# Altium PCB PA-03225-V0.4-4.PcbDoc (part 1 of 4)
Units mm, origin at the board's own origin, x right, y up, seen from the top; angles counter-clockwise.
Board outline 43 x 41 mm, 6 copper layers (Top Layer, GND, L3, L4, PWR, Bottom Layer); 103 components, 178 nets, 551 pads, 290 vias.
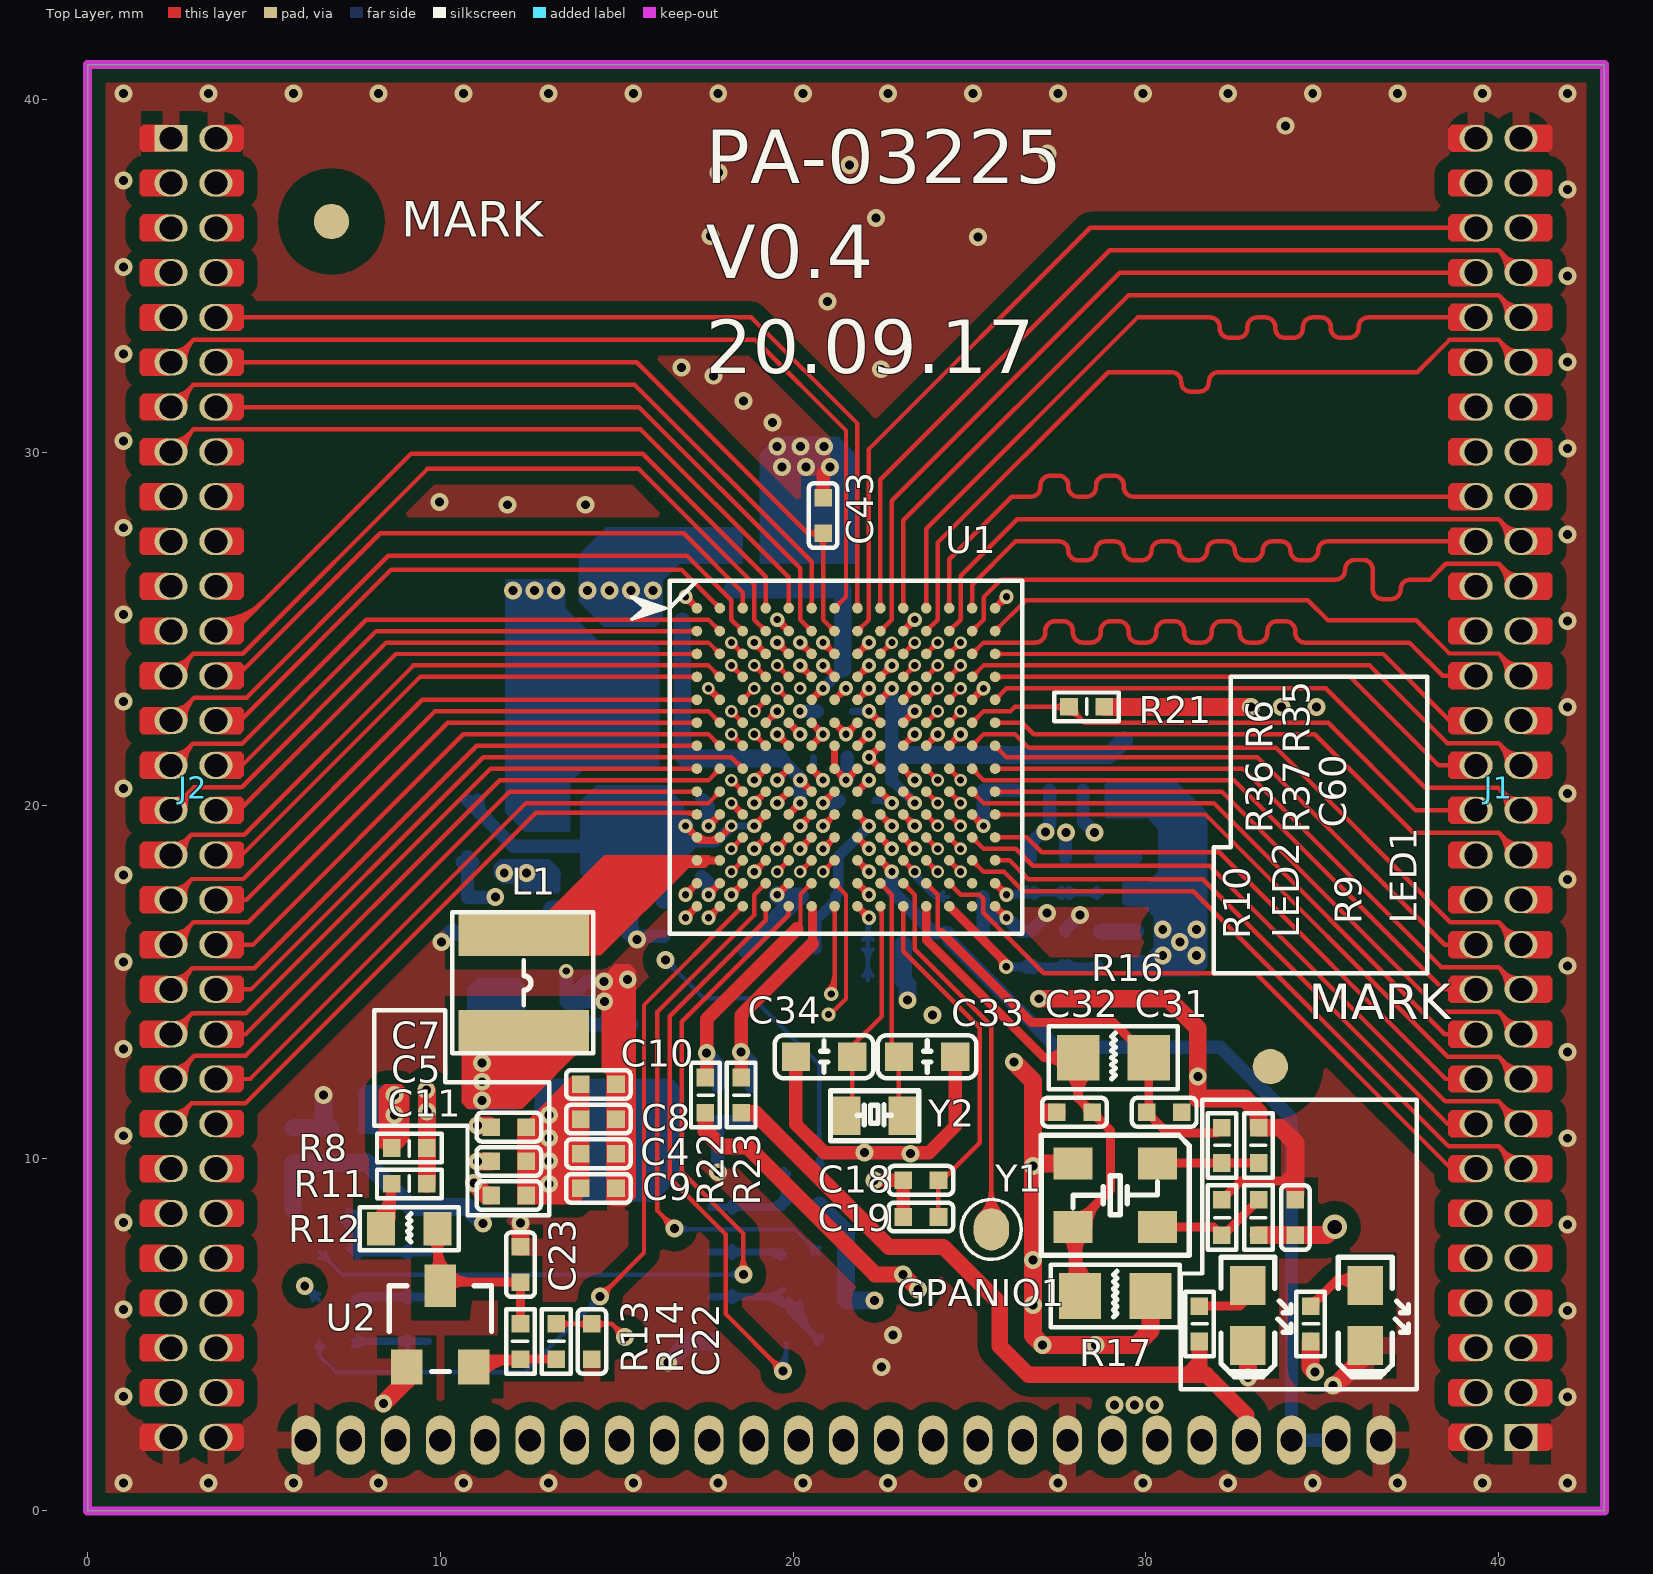
[diagram p0: Top Layer view]
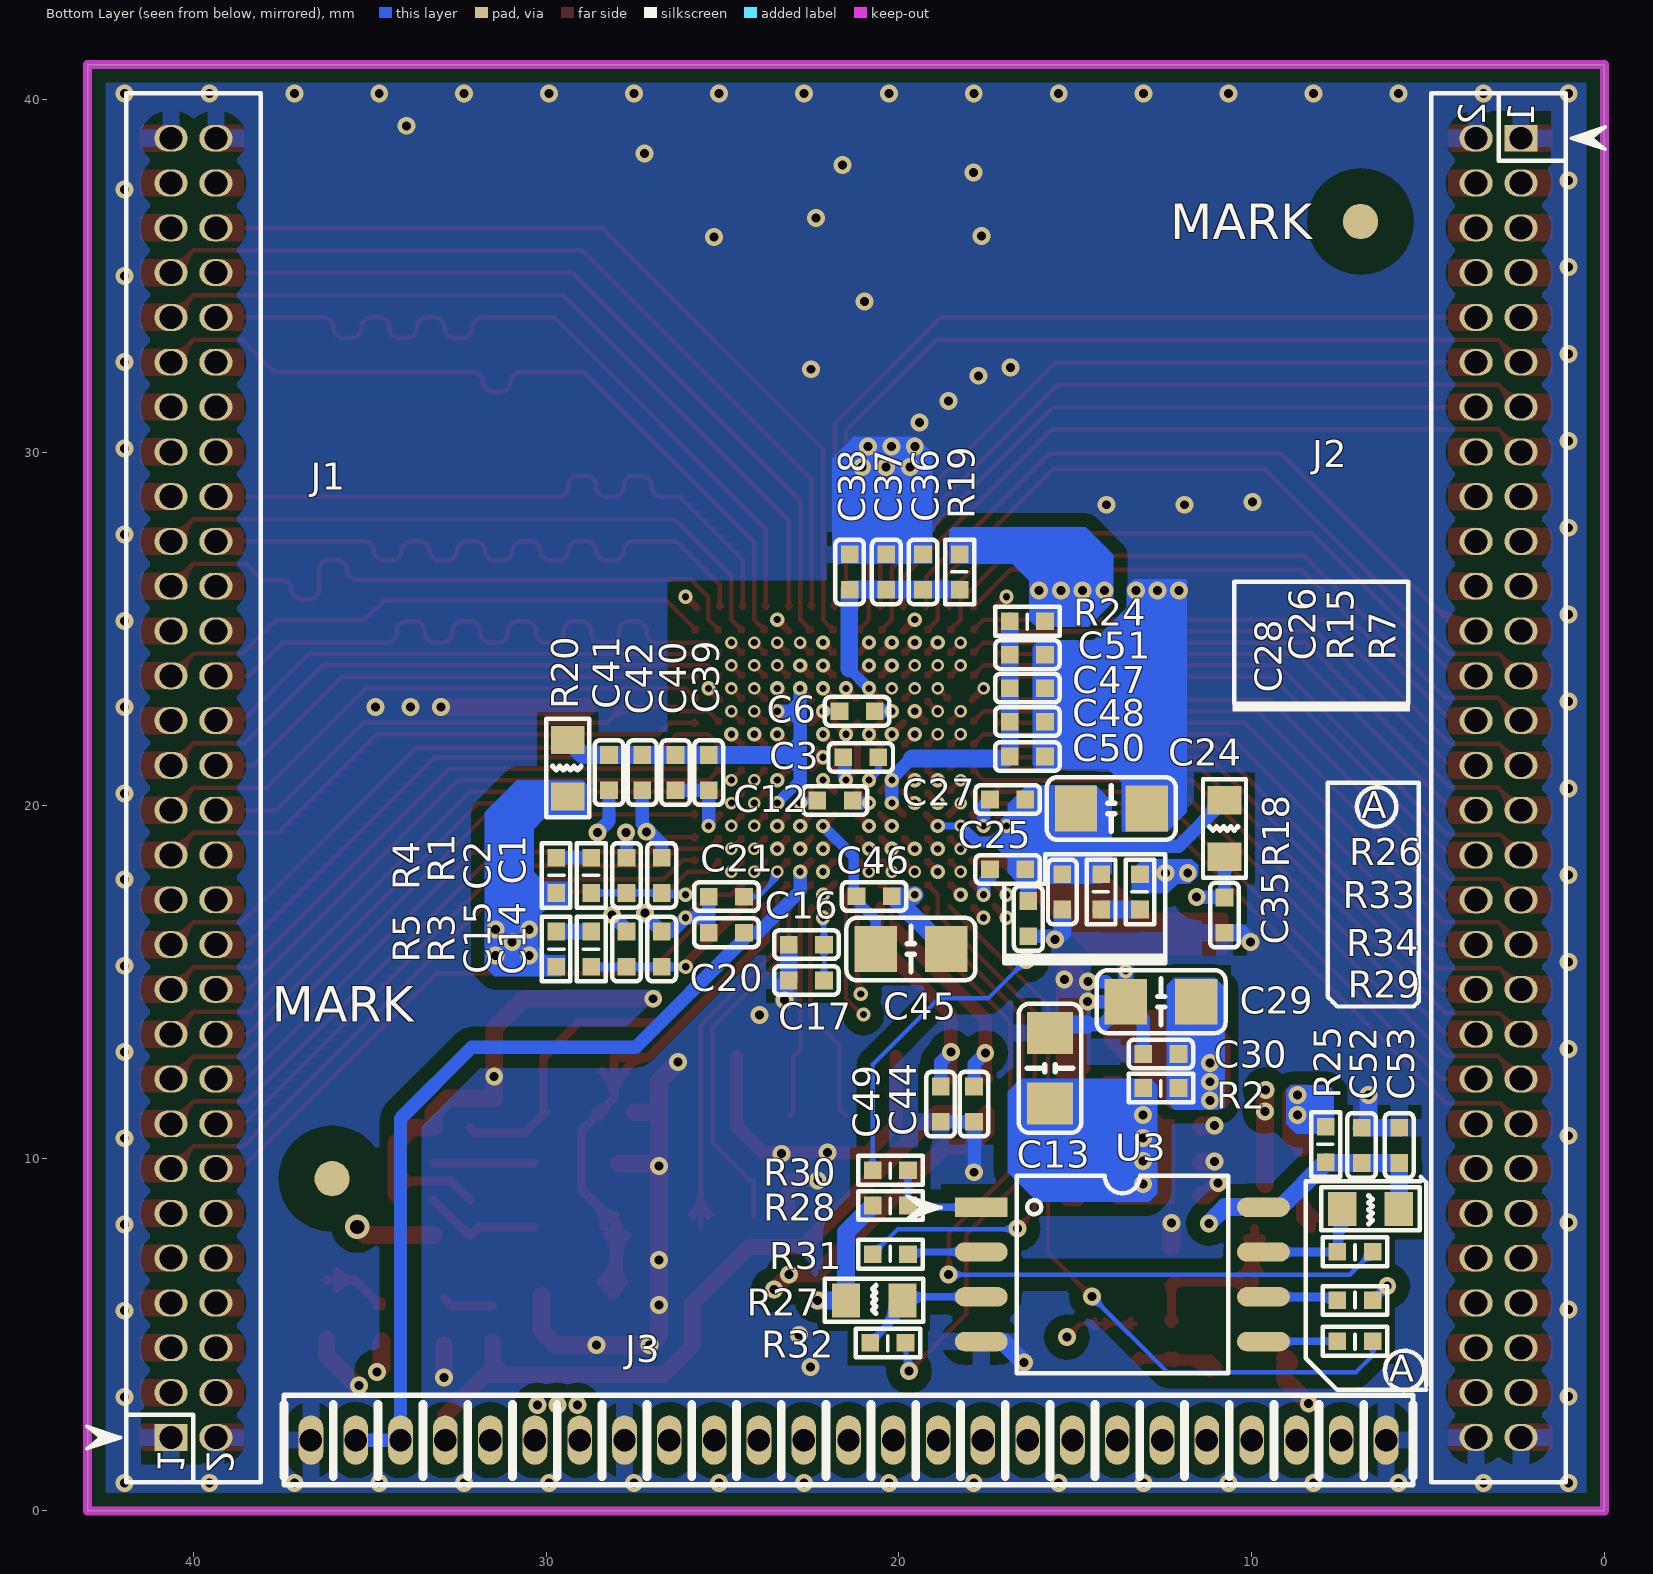
[diagram p1: Bottom Layer view, seen from below]
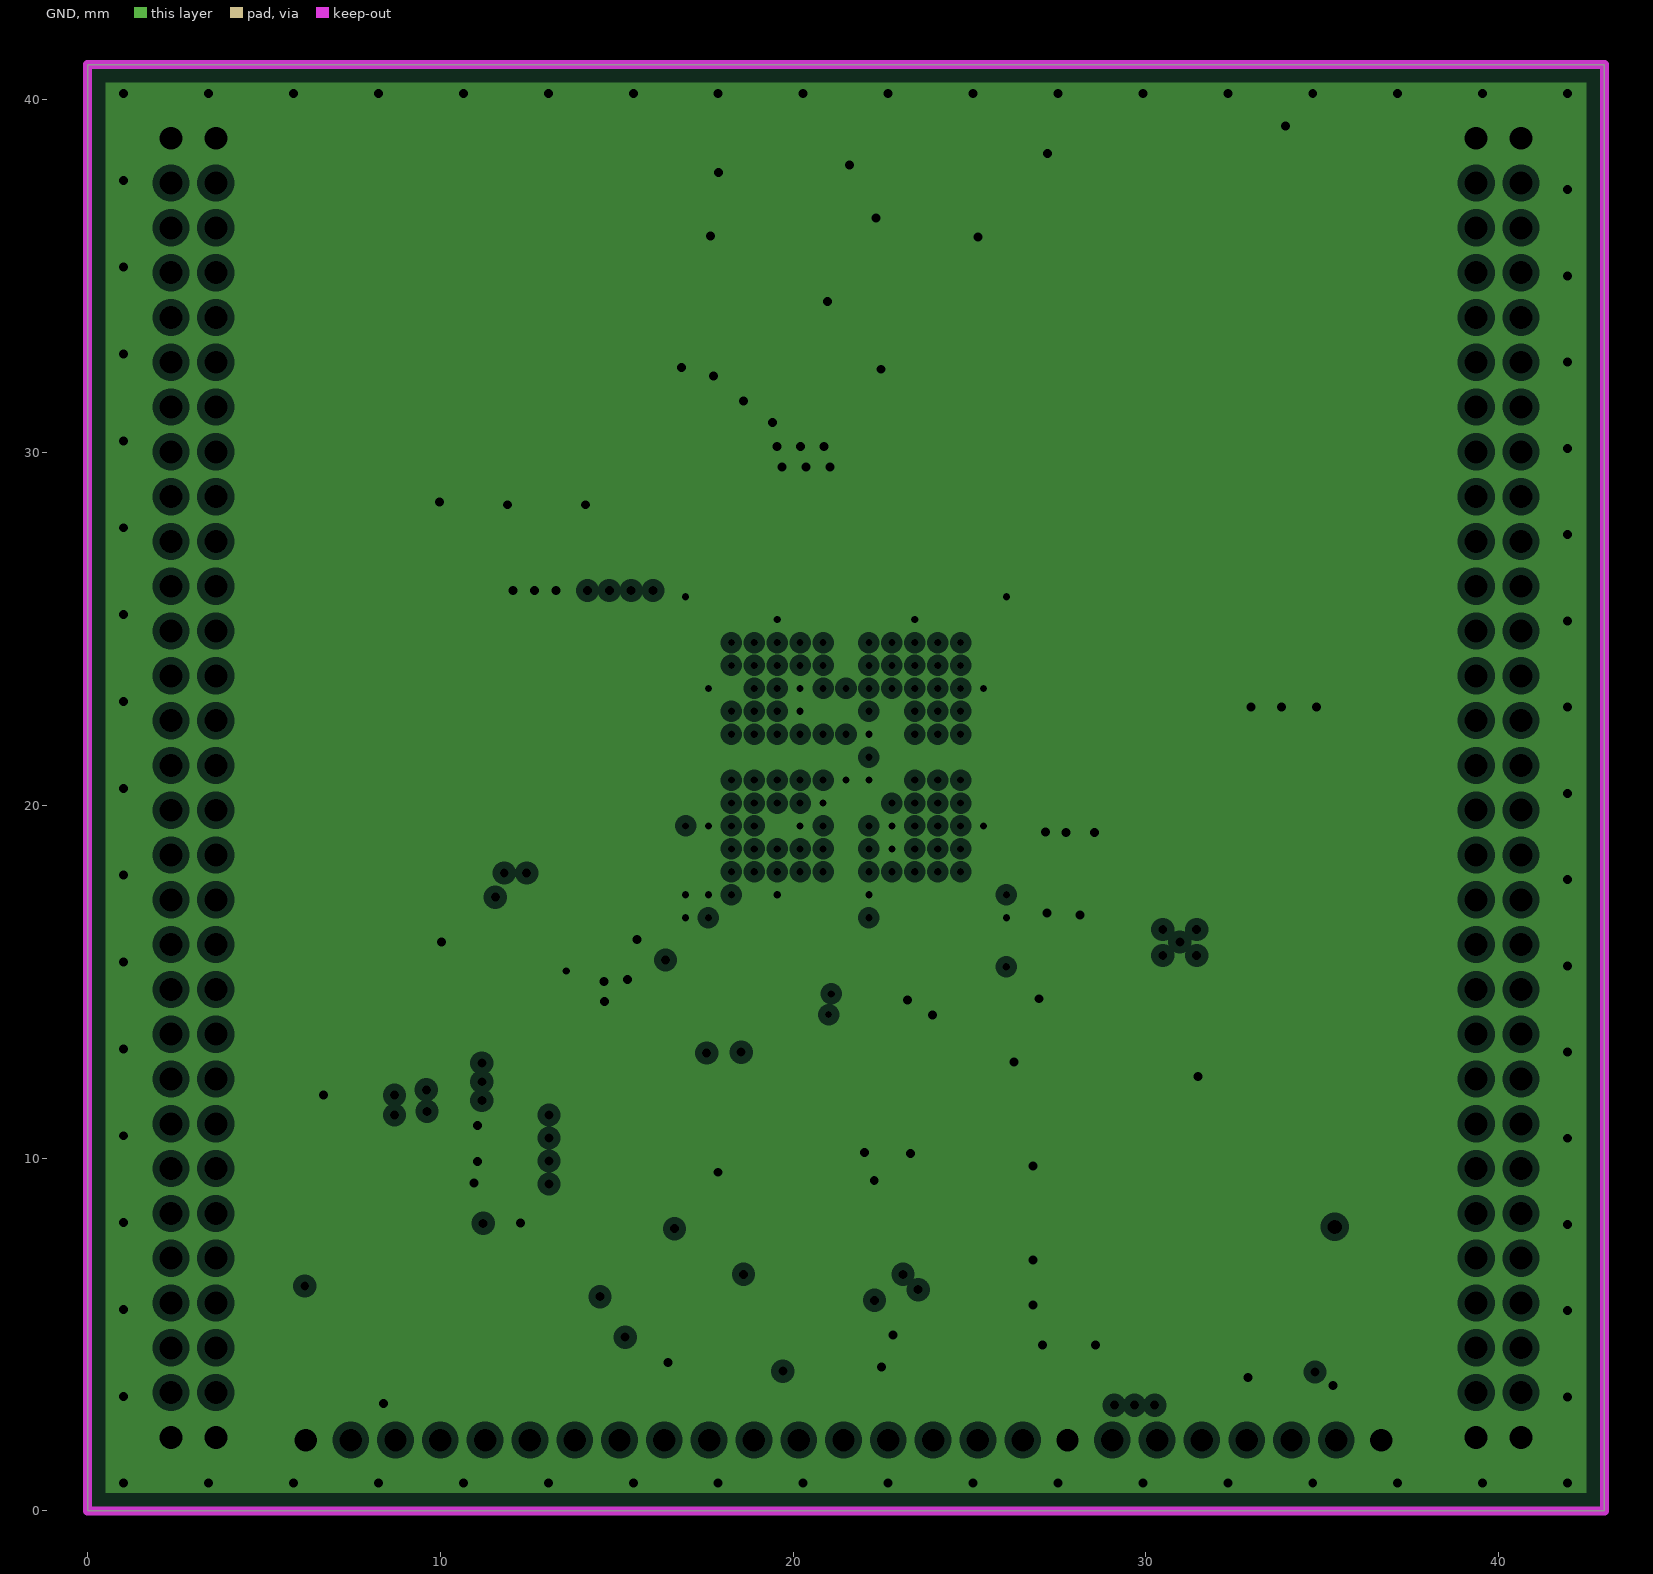
[diagram p2: GND, clearances drawn from the general rule]
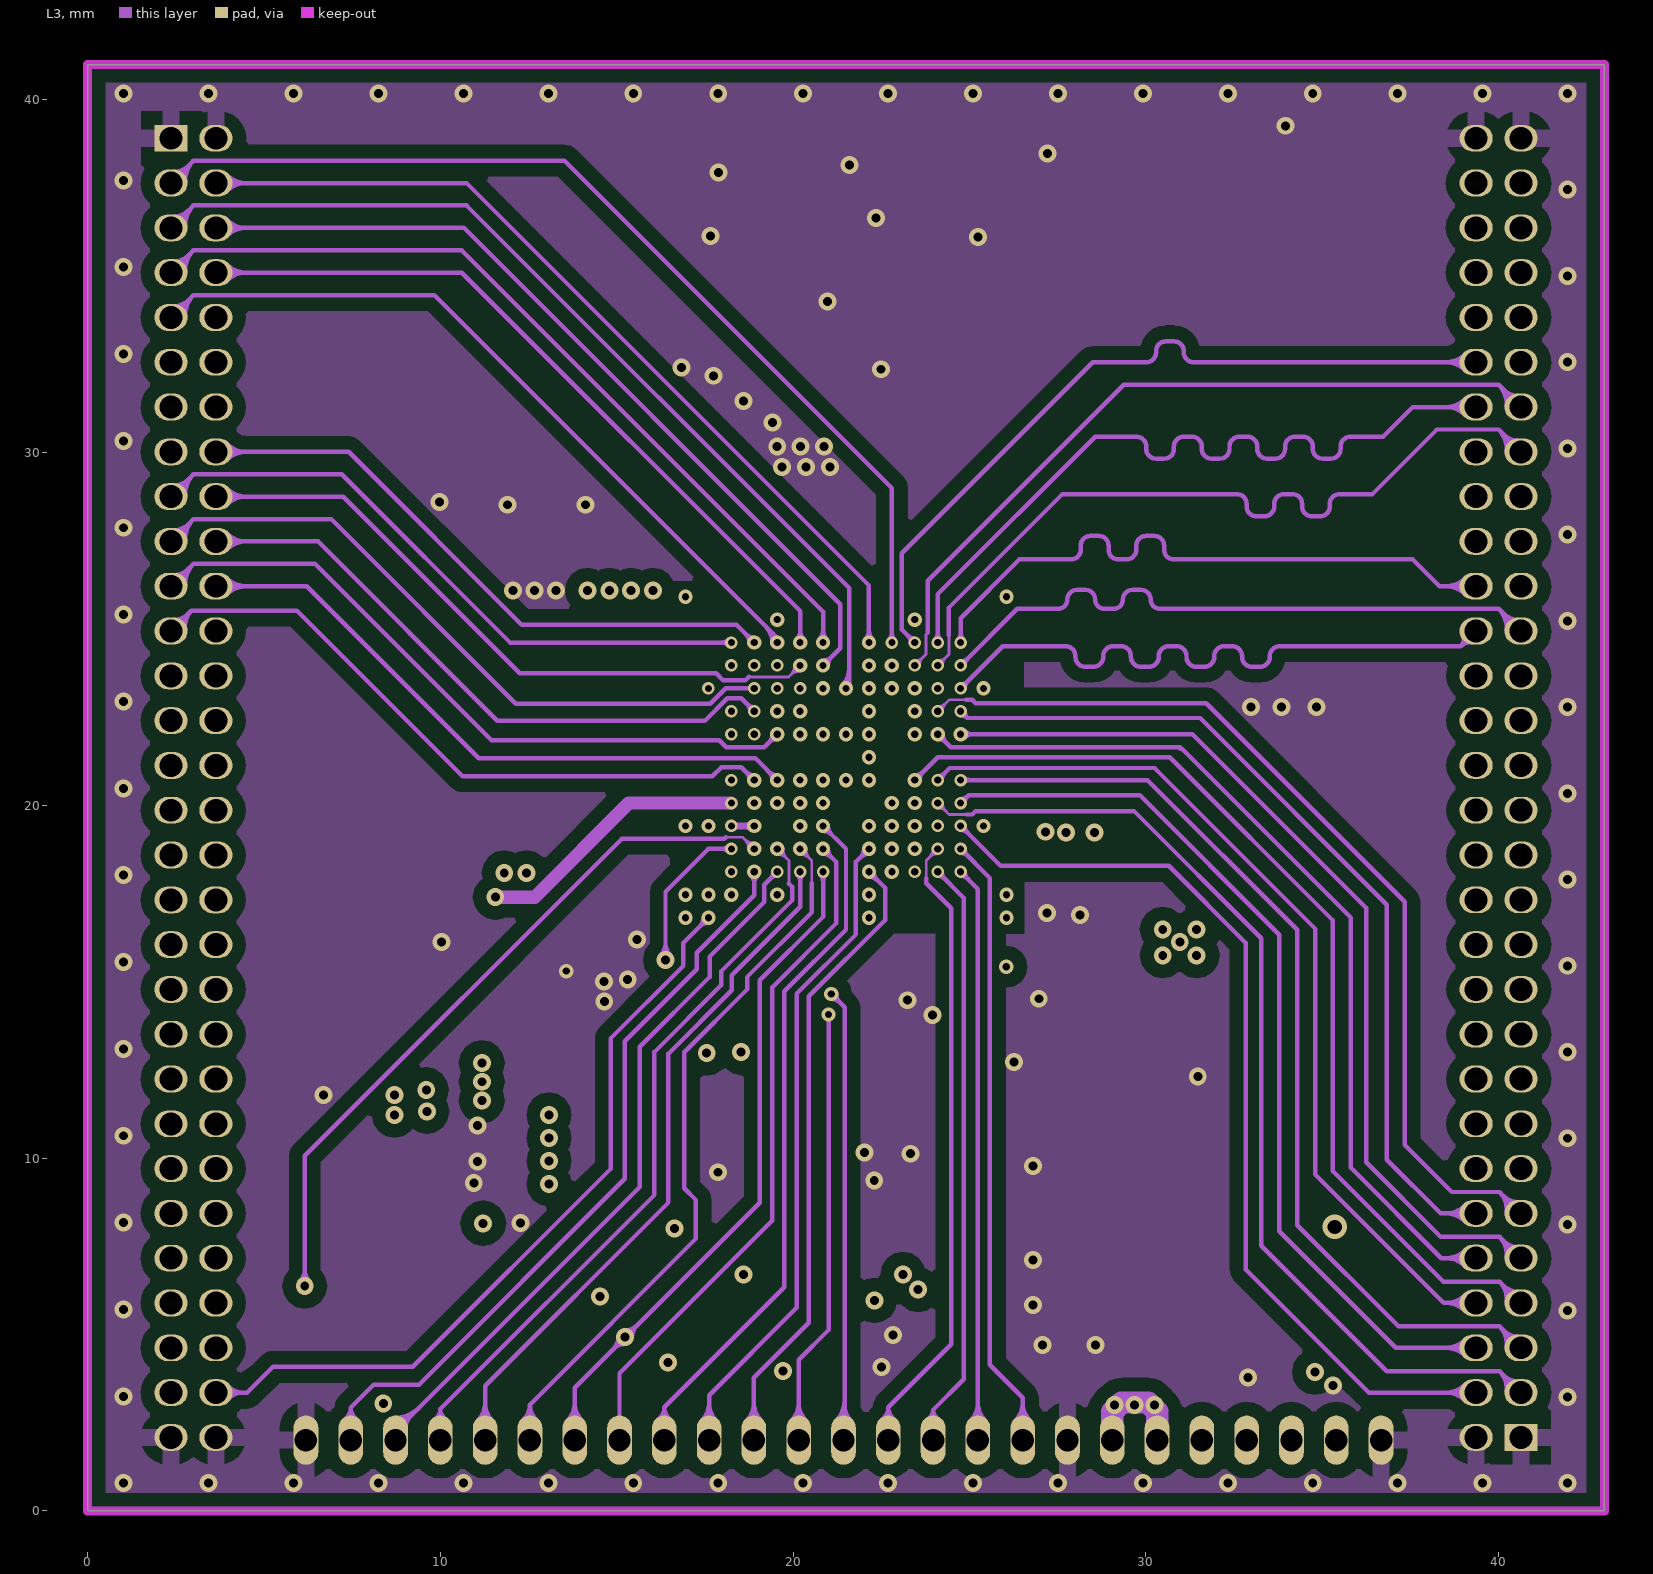
[diagram p3: L3]
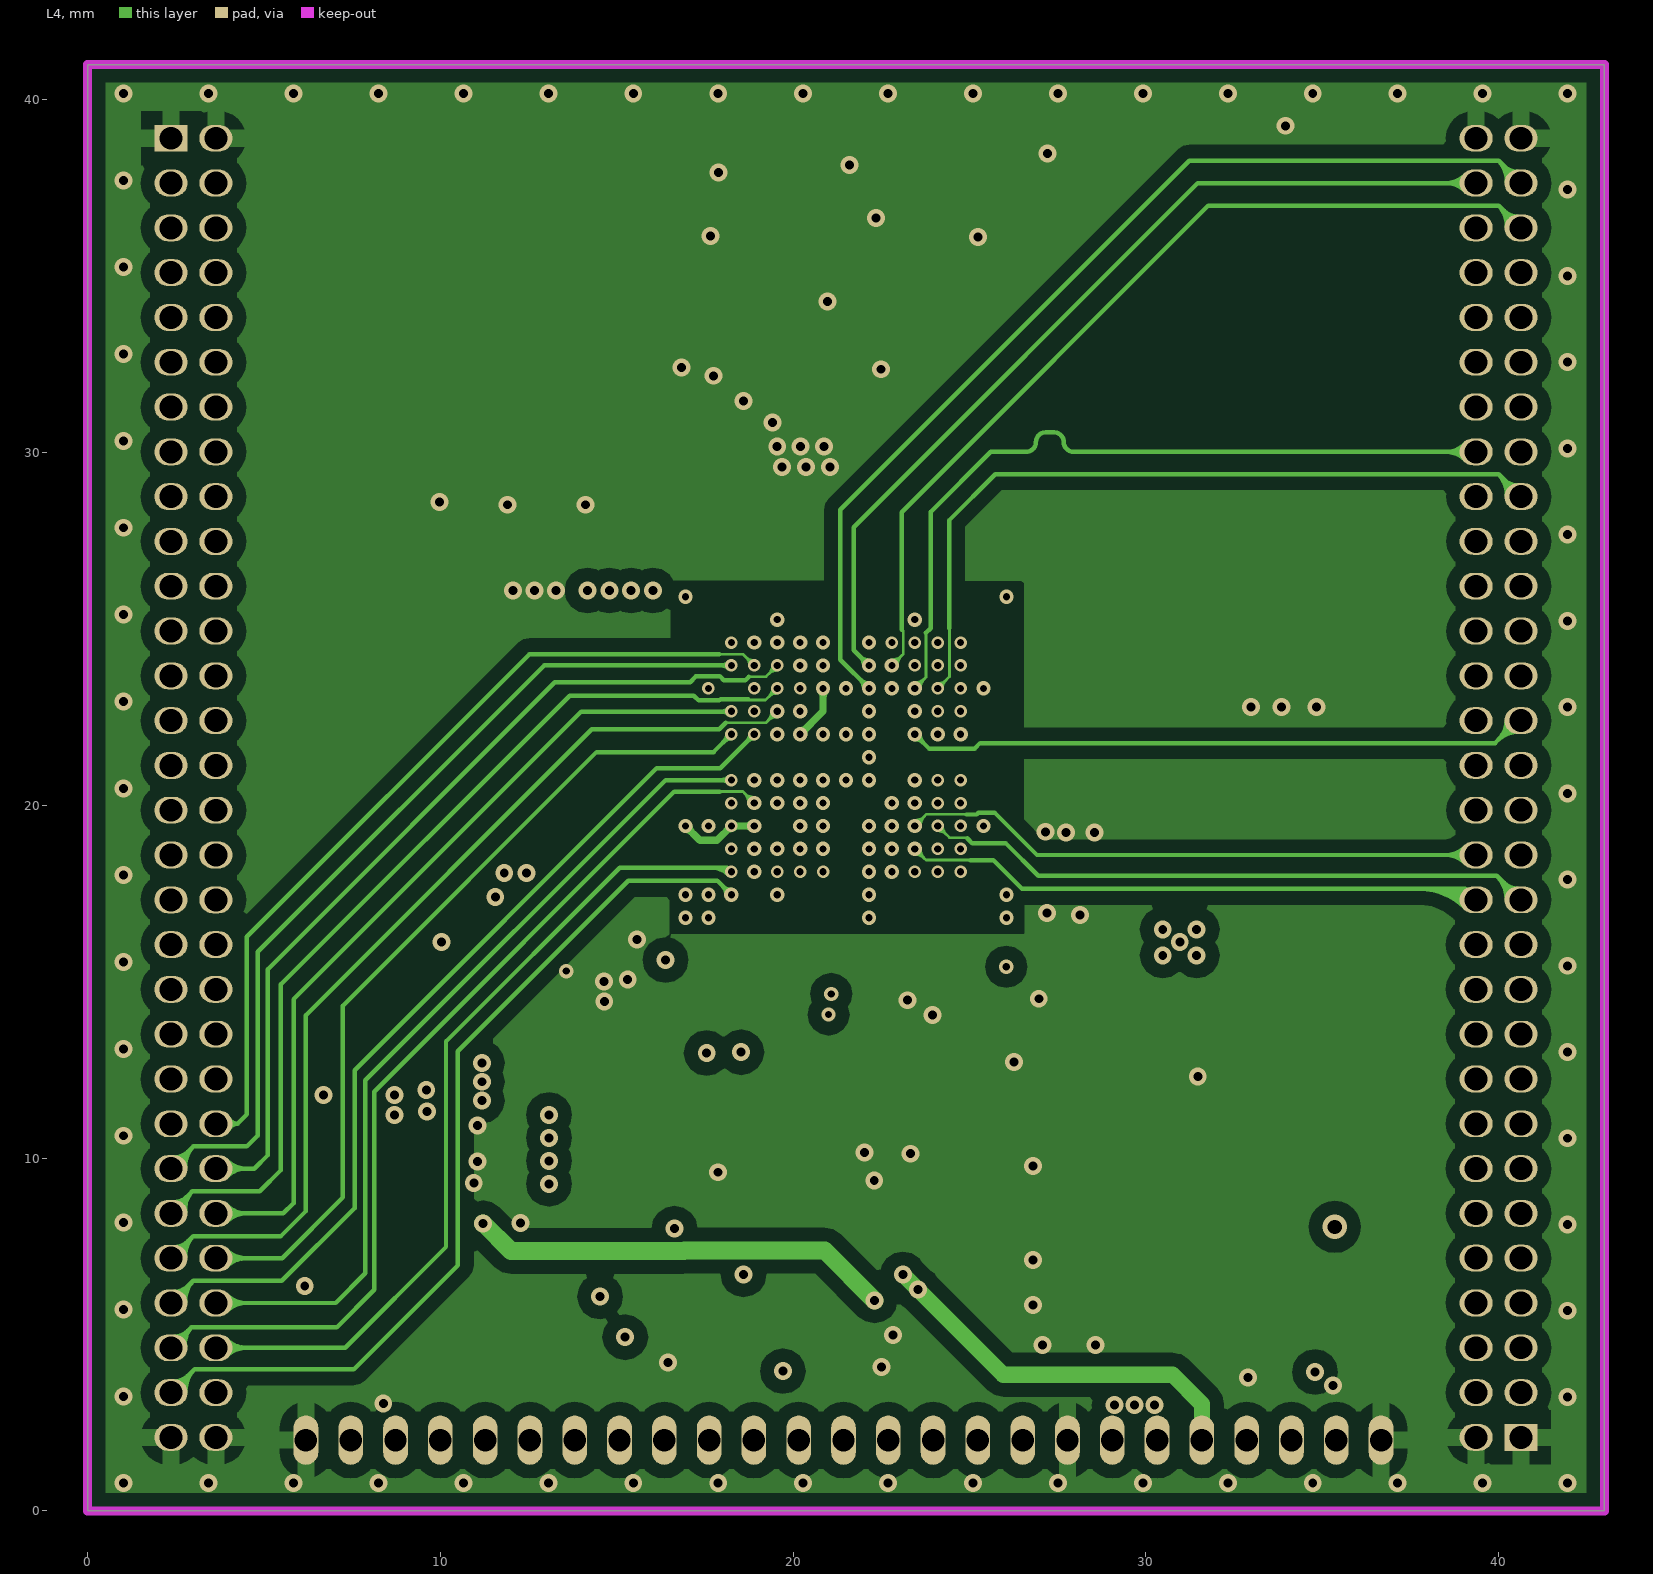
[diagram p4: L4]
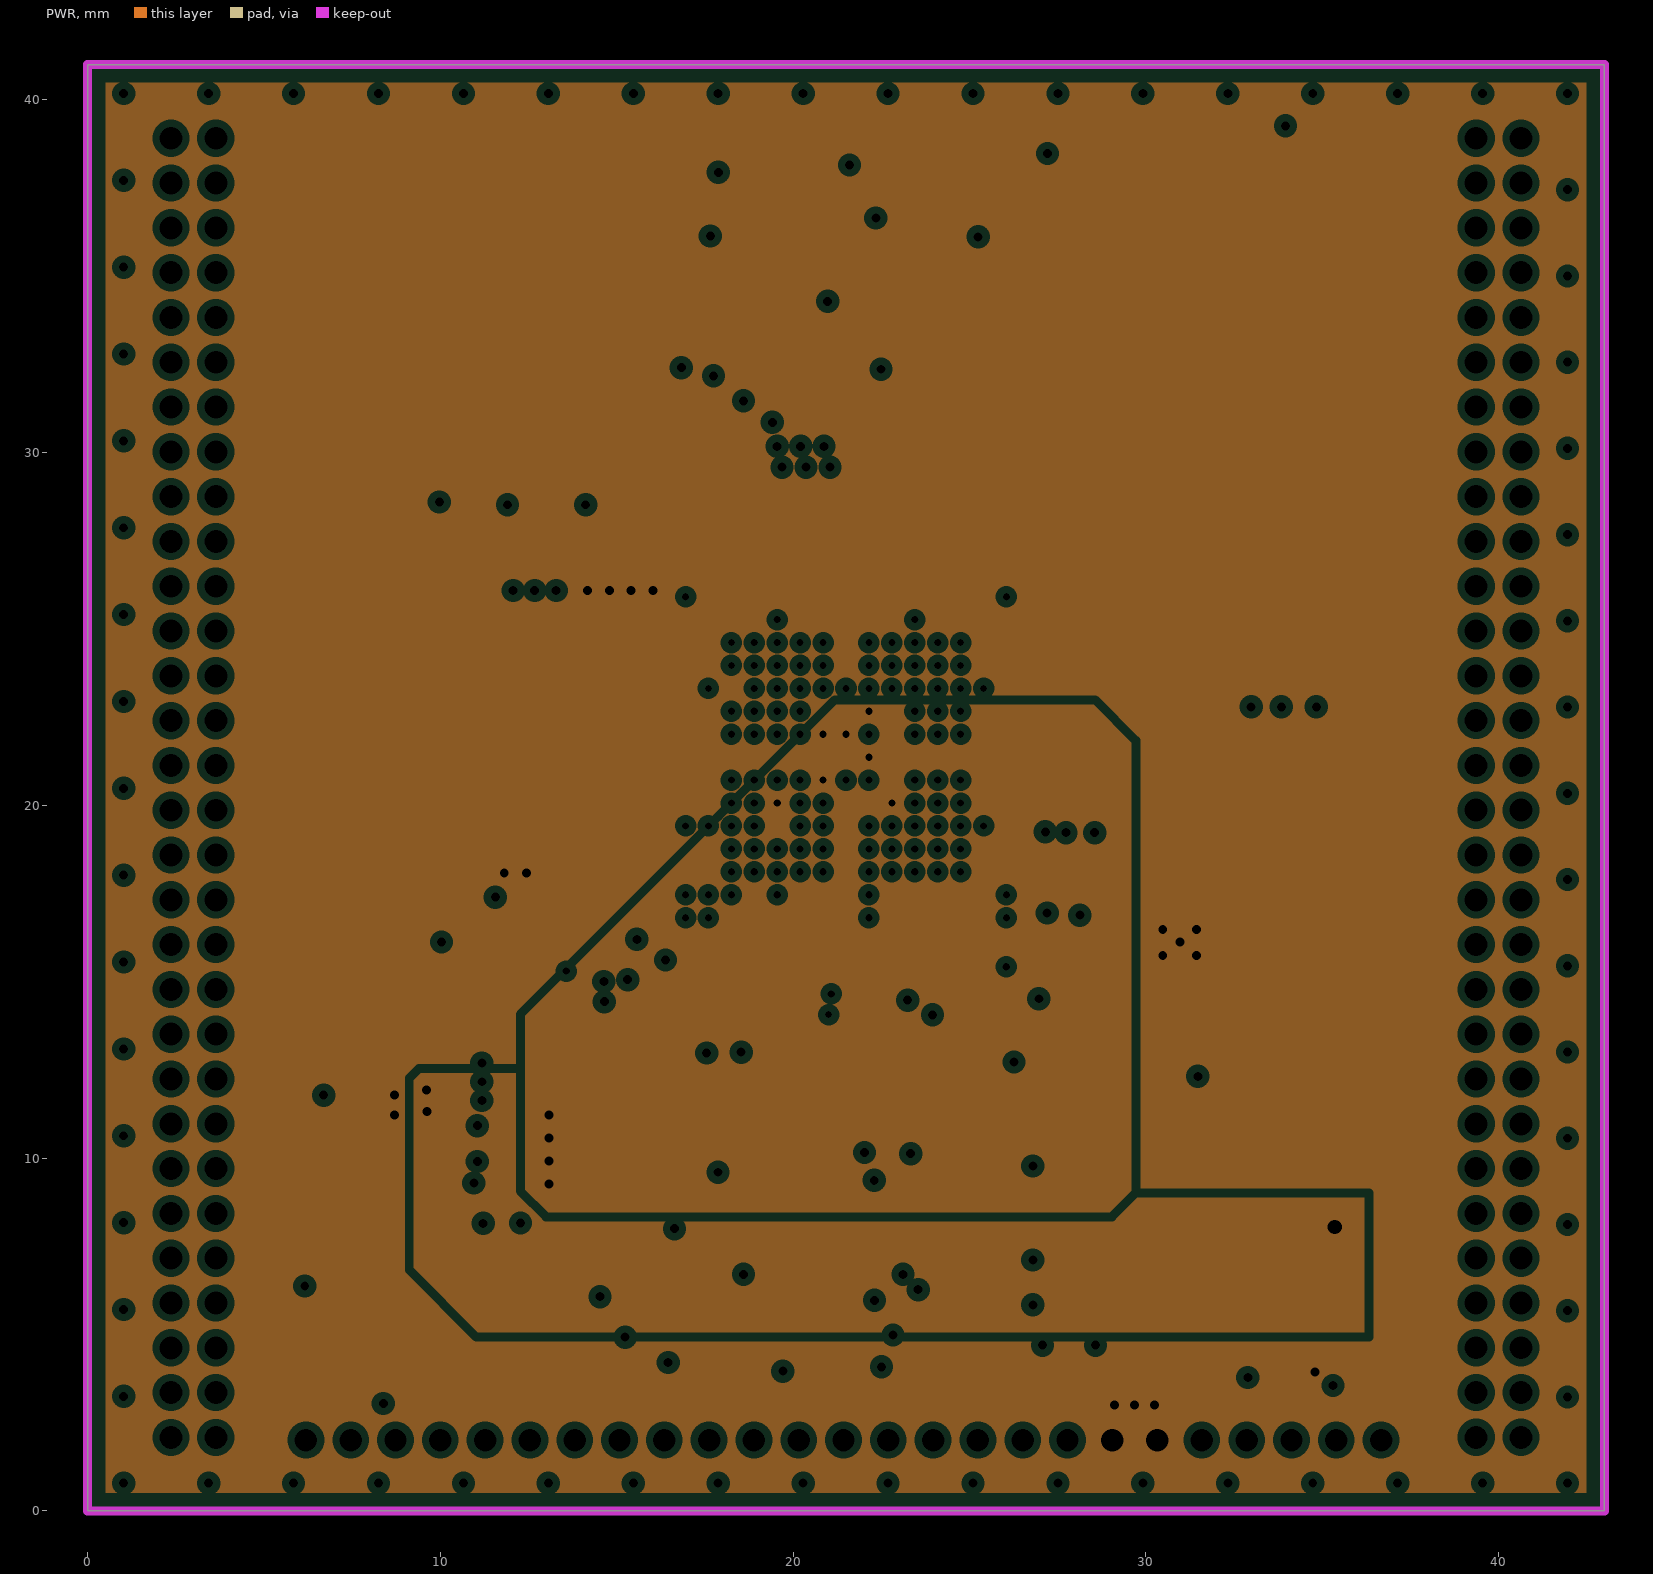
[diagram p5: PWR, clearances drawn from the general rule]

## Layer stack, top to bottom
Top Layer: signal copper 0.0356
Dielectric: core 0.32, FR-4, Dk 4.8
GND: plane copper 0.0356, net GND
Dielectric: prepreg 0.32, FR-4, Dk 4.8
L3: signal copper 0.0356
Dielectric: core 0.32, FR-4, Dk 4.8
L4: signal copper 0.0356
Dielectric: prepreg 0.32, FR-4, Dk 4.8
PWR: plane copper 0.0356, net (Multiple Nets)
Dielectric: core 0.32, FR-4, Dk 4.8
Bottom Layer: signal copper 0.0356

## Board outline
0,0 0,41 43,41 43,0

## Design rules (kind name [scope] priority, off if disabled: settings)
AssemblyTestPointUsage [All] p1 off:
AssemblyTestpoint [All] p1 off: testpointundercomponent=TRUE minsize=1.016 maxsize=2.54 preferedsize=1.524 minholesize=0 maxholesize=1.016 preferedholesize=0.813 testpointgrid=0.025 usegrid=TRUE gridtolerance=0 allowsidetop=TRUE allowsidebottom=TRUE
Clearance Clearance-KEEPOUT [OnLayer('Keep-Out Layer')] p1: gap=0.381
Clearance Clearance-BGA [WithinRoom('BGA')] p2: gap=0.102
Clearance Clearance-INPOLY [InPolygon] p3: gap=0.381
Clearance Check-ALL [All] p4: gap=0.127
ComponentClearance [All] p1: gap=0.08 collisioncheckmode=3 verticalgap=0.254 showdistances=FALSE
DiffPairsRouting [All] p1: maxlimit=0.246 minlimit=0.24 mostfreqgap=0.246 toplayer_prefgap=0.24 midlayer1_mingap=0.246 midlayer2_mingap=0.246 bottomlayer_prefgap=0.24 maxuncoupledlength=12.7
FabricationTestPointUsage [All] p1 off: valid=0 allowmultiple=FALSE
FabricationTestpoint [All] p1 off: side=3 testpointundercomponent=TRUE minsize=1.016 maxsize=2.54 preferedsize=1.524 minholesize=0 maxholesize=1.016 preferedholesize=0.813 testpointgrid=0.025 allowsidetop=TRUE allowsidebottom=TRUE usegrid=TRUE gridtolerance=0
FanoutControl Fanout_BGA [IsBGA] p1 off: bgadir=Out bgaviamode=Centered fanoutstyle=Auto fanoutdirection=Alternating viagrid=0.025 // Fanout_BGA (Default Rule)
FanoutControl Fanout_LCC [IsLCC] p2 off: bgadir=Out bgaviamode=Centered fanoutstyle=Auto fanoutdirection=Alternating viagrid=0.025 // Fanout_LCC (Default Rule)
FanoutControl Fanout_SOIC [IsSOIC] p3 off: bgadir=Out bgaviamode=Centered fanoutstyle=Auto fanoutdirection=Alternating viagrid=0.025 // Fanout_SOIC (Default Rule)
FanoutControl Fanout_Small [(CompPinCount < 5)] p4 off: bgadir=Out bgaviamode=Centered fanoutstyle=Auto fanoutdirection=OutThenIn viagrid=0.025 // Fanout_Small (Default Rule)
FanoutControl Fanout_Default [All] p5 off: bgadir=Out bgaviamode=Centered fanoutstyle=Auto fanoutdirection=Alternating viagrid=0.025 // Fanout_Default (Default Rule)
Height [All] p1 off: minheight=0 maxheight=25.4 prefheight=12.7
HoleSize [All] p1: absolutevalues=TRUE maxlimit=0.762 minlimit=0.203 maxpercent=80.000 minpercent=20.000
HoleToHoleClearance [All] p1: gap=0 allowstackedmicrovias=TRUE
MinimumSolderMaskSliver [All] p1: minsoldermaskwidth=0
PlaneClearance PlaneClearance-all [All] p1: clearance=0.203
PlaneConnect PlaneConnect_pad [IsPadHoleValid] p1: planeconnectstyle=Relief reliefexpansion=0.305 reliefentries=4 reliefconductorwidth=0.381 reliefairgap=0.254
PlaneConnect PlaneConnect-all [All] p2: planeconnectstyle=Direct reliefexpansion=0.508 reliefentries=4 reliefconductorwidth=0.254 reliefairgap=0.254
PolygonConnect VIA [All vs IsVia] p1: connectstyle=Direct reliefconductorwidth=0.254 reliefentries=4 polygonreliefangle="90 Angle"
PolygonConnect ALL [All] p2: connectstyle=Relief reliefconductorwidth=0.5 reliefentries=4 polygonreliefangle="90 Angle"
RoomDefinition BGA [InComponentClass('Components Class 1')] p1: confinementstyle=ConfineIn formatcopy=TRUE lockcomponents=FALSE outline 16.577,26.414 26.318,26.414 26.318,16.456 16.577,16.456
RoutingVias [All] p1: holewidth=0.254 width=0.508 viastyle="Through Hole" minholewidth=0.203 minwidth=0.356 maxholewidth=10 maxwidth=10
SilkToSilkClearance [All] p1: silktosilkclearance=0
SilkscreenOverComponentPads [All] p1 off: minsilkscreentomaskgap=0
SolderMaskExpansion [All] p1: expansion=0.102
Width [All] p1: maxlimit=10 minlimit=0.076 preferedwidth=0.127
9 further rules are at their usual default settings.

## Classes and differential pairs
net class GND-POWER: DCDC_3V3 GND NVCC_GPIO_3V3 NVCC_SD NVCC_SEMC_3V3 VCC33 VDD_SNVS_IN VDD_SOC_IN VDD_USB_3V
net class RMII2: A11_ENET2_RXER B11_RMII2-RXD0 C10_RMII2-TXD0 C11_RMII2-RXD1 D10_RMII2-TXD1 D11_RMII2-CRS_DV E10_RMII2-TX_EN E11_RMII2-REF_CLK
net class RMII1: A12_RMII1-TXD1 A13_RMII1-TX_EN B12_RMII1-TXD0 B13_RMII1-REF_CLK C12_RMII1-CRS_DV C13_ENET1_RXER D12_RMII1-RXD1 E12_RMII1-RXD0
net class SAI2: F2_SAI2_TX_DATA G5_SAI2_TX_SYNC H3_SAI2_RX_DATA H4_SAI2_MCLK H5_SAI2_TX_BLCK
net class SAI3: B7_SAI3_TX_SYNC C3_SAI3_TX_DATA C4_SAI3_RX_DATA D6_SAI3_TX_BLCK E4_SAI3_MCLK
net class SAI1: G12_SAI1_TX_BLCK H11_SAI1_TX_DATA0 J14_SAI1_TX_SYNC M13_SAI1_MCLK

## Components (designator, comment, footprint, x,y, rotation, side; value= is the part's Value field where it differs from the comment)
C1 "224/25V-10%-0402" BL-C0402 26.724,18.019 r90 bottom
C2 "105/10V-10%-0402-X5R" BL-C0402 27.722,18.019 r90 bottom
C3 "224/25V-10%-0402" BL-C0402 21.082,21.361 r0 bottom
C4 "224/25V-10%-0402" BL-C0402 14.478,10.126 r0 top
C5 "224/25V-10%-0402" BL-C0402 11.94,9.91 r180 top
C6 "224/25V-10%-0402" BL-C0402 21.184,22.669 r180 bottom
C7 "224/25V-10%-0402" BL-C0402 11.94,10.879 r180 top
C8 "224/25V-10%-0402" BL-C0402 14.478,11.109 r0 top
C9 "224/25V-10%-0402" BL-C0402 14.478,9.144 r0 top
C10 "224/25V-10%-0402" BL-C0402 14.478,12.091 r0 top
C11 "224/25V-10%-0402" BL-C0402 11.94,8.941 r180 top
C12 "475/6.3V-20%-0402" BL-C0402 21.81,20.141 r0 bottom
C13 "226/10V-20%-0805-X5R" BL-C0805 15.714,12.548 r270 bottom
C14 "105/10V-10%-0402-X5R" BL-C0402 26.724,15.926 r270 bottom
C15 "475/6.3V-20%-0402" BL-C0402 27.722,15.926 r90 bottom
C16 "475/6.3V-20%-0402" BL-C0402 22.623,16.055 r180 bottom
C17 "224/25V-10%-0402" BL-C0402 22.623,15.039 r0 bottom
C18 "475/6.3V-20%-0402" BL-C0402 23.622,9.373 r0 top
C19 "224/25V-10%-0402" BL-C0402 23.622,8.331 r180 top
C20 "105/10V-10%-0402-X5R" BL-C0402 24.892,16.392 r180 bottom
C21 "224/25V-10%-0402" BL-C0402 24.892,17.415 r0 bottom
C22 "104/16V-10%-0402-X7R" BL-C0402 14.296,4.804 r90 top
C23 "104/16V-10%-0402-X7R" BL-C0402 12.272,6.985 r270 top
C24 "226/10V-20%-0805-X5R" BL-C0805 13.978,19.914 r0 bottom
C25 "224/25V-10%-0402" BL-C0402 16.916,18.186 r0 bottom
C26 "224/25V-10%-0402" BL-C0402 15.367,17.55 r270 bottom
C27 "224/25V-10%-0402" BL-C0402 16.916,20.168 r0 bottom
C28 "224/25V-10%-0402" BL-C0402 16.332,16.789 r270 bottom
C29 "226/10V-20%-0805-X5R" BL-C0805 12.567,14.437 r180 bottom
C30 "224/25V-10%-0402" BL-C0402 12.576,12.954 r0 bottom
C31 "15P/50V-5%-0402" BL-C0402 30.522,11.303 r180 top
C32 "15P/50V-5%-0402" BL-C0402 27.976,11.303 r0 top
C33 "10PF/50V-5%-0603-COG" BL-C0603 23.8,12.878 r180 top
C34 "10PF/50V-5%-0603-COG" BL-C0603 20.879,12.878 r0 top
C35 "224/25V-10%-0402" BL-C0402 10.77,16.891 r270 bottom
C36 "104/16V-10%-0402-X7R" BL-C0402 19.317,26.619 r270 bottom
C37 "104/16V-10%-0402-X7R" BL-C0402 20.357,26.619 r270 bottom
C38 "475/6.3V-20%-0402" BL-C0402 21.398,26.619 r270 bottom
C39 "104/16V-10%-0402-X7R" BL-C0402 25.392,20.93 r90 bottom
C40 "104/16V-10%-0402-X7R" BL-C0402 26.335,20.93 r90 bottom
C41 "104/16V-10%-0402-X7R" BL-C0402 28.219,20.93 r90 bottom
C42 "475/6.3V-20%-0402" BL-C0402 27.277,20.93 r90 bottom
C43 "104/16V-10%-0402-X7R（NC）" BL-C0402 20.85,28.218 r270 top
C44 "105/10V-10%-0402-X5R" BL-C0402 17.87,11.532 r90 bottom
C45 "106/16V-10%-0805-X5R" BL-C0805 19.66,15.928 r0 bottom
C46 "104/16V-10%-0402-X7R" BL-C0402 20.701,17.423 r0 bottom
C47 "104/16V-10%-0402-X7R" BL-C0402 16.358,23.326 r0 bottom
C48 "475/6.3V-20%-0402" BL-C0402 16.358,22.378 r0 bottom
C49 "105/10V-10%-0402-X5R" BL-C0402 18.818,11.532 r90 bottom
C50 "104/16V-10%-0402-X7R" BL-C0402 16.358,21.387 r0 bottom
C51 "475/6.3V-20%-0402" BL-C0402 16.358,24.274 r0 bottom
C52 "104/16V-10%-0402-X7R" BL-C0402 6.883,10.363 r270 bottom
C53 "105/10V-10%-0402-X5R" BL-C0402 5.817,10.363 r270 bottom
C60 "103/25V-10%-0402-X7R" BL-C0402 34.239,8.317 r90 top
GPANIO1 "测试点" TP-1.0MM 25.62,7.982 r90 top
J1 "1.27-2*30V-3.9*1.0*2.3" BL-1.27-2*30V-4.3*2.8 40,20.5 r90 top
J2 "1.27-2*30V-3.9*1.0*2.3" BL-1.27-2*30V-4.3*2.8 3,20.5 r270 top
J3 "1.27-1*25V-3.9*1.0*2.3" BL-1.27-1*25V 21.429,2.008 r0 bottom locked
L1 "TAIYOYUDEN-NR4018T4R7M(1.2A)" BL-NR4018T4R7M 12.37,14.971 r270 top
LED1 "白发红-0603" BL-LED-0603 36.22,5.544 r270 top
LED2 "白发绿-0603" BL-LED-0603 32.893,5.544 r270 top
R1 "0R-1%-0402" BL-R0402 28.72,18.019 r270 bottom
R2 "0R-1%-0402" BL-R0402 12.576,11.989 r180 bottom
R3 "0R-1%-0402" BL-R0402 28.72,15.926 r270 bottom
R4 "0R-1%-0402" BL-R0402 29.718,18.019 r90 bottom
R5 "0R-1%-0402" BL-R0402 29.718,15.926 r90 bottom
R6 "0R-1%-0402" BL-R0402 32.156,10.363 r90 top
R7 "0R-1%-0402" BL-R0402 13.165,17.55 r270 bottom
R8 "0R-1%-0402" BL-R0402 9.119,10.287 r0 top
R9 "10K-1%-0402" BL-R0402 34.671,5.304 r90 top
R10 "10K-1%-0402" BL-R0402 31.519,5.304 r90 top
R11 "0R-1%-0402" BL-R0402 9.119,9.271 r180 top
R12 "1K5-1%-0603" BL-R0603 9.119,8.001 r0 top
R13 "0R-1%-0402(NC)" BL-R0402 12.272,4.804 r270 top
R14 "1K-1%-0402" BL-R0402 13.284,4.804 r90 top
R15 "0R-1%-0402" BL-R0402 14.266,17.55 r270 bottom
R16 "1M-1%-0402(NC)" BL-R0805 29.083,12.848 r180 top
R17 "2M2-1%-0805（NC）" BL-R0805 29.133,6.096 r180 top
R18 "30K-1%-0603" BL-R0603 10.77,19.345 r90 bottom
R19 "0R-1%-0402" BL-R0402 18.276,26.619 r270 bottom
R20 "0R-1%-0603" BL-R0603 29.388,21.057 r90 bottom
R21 "4K7-1%-0402(NC)" BL-R0402 28.321,22.796 r180 top
R22 "0R-1%-0402" BL-R0402 17.512,11.786 r90 top
R23 "0R-1%-0402" BL-R0402 18.528,11.786 r90 top
R24 "0R-1%-0402" BL-R0402 16.358,25.223 r180 bottom
R25 "0R-1%-0402" BL-R0402 7.899,10.389 r270 bottom
R26 "33K-1%-0603(NC)" BL-R0603 6.629,8.562 r0 bottom
R27 "33K-1%-0603(NC)" BL-R0603 20.702,5.97 r180 bottom
R28 "10K-1%-0402" BL-R0402 20.244,8.658 r180 bottom
R29 "0R-1%-0402" BL-R0402 7.07,4.809 r180 bottom
R30 "0R-1%-0402" BL-R0402 20.244,9.66 r180 bottom
R31 "0R-1%-0402" BL-R0402 20.244,7.275 r0 bottom
R32 "0R-1%-0402" BL-R0402 20.313,4.765 r180 bottom
R33 "0R-1%-0402" BL-R0402 7.07,7.346 r180 bottom
R34 "0R-1%-0402" BL-R0402 7.07,5.969 r0 bottom
R35 "0R-1%-0402(NC)" BL-R0402 33.198,10.363 r270 top
R36 "0R-1%-0402" BL-R0402 32.156,8.317 r90 top
R37 "0R-1%-0402(NC)" BL-R0402 33.198,8.317 r270 top
U1 "NXP-MIMXRT1061CVL5A(BGA-196)" MAPBGA196/0.65/10X10 21.5,21.369 r0 top locked
U2 "Union-UM803RS(SOT23)" SOT-23-3 9.999,5.231 r0 top
U3 "WINBOND-W25Q32JVSSIQ(SOIC-8)" SOIC8/1.27/8 13.665,6.706 r180 bottom
Y1 "24MHz无源(3225-4Pin)" BL-3225-4Pin 29.133,8.949 r270 top
Y2 "32.768KHz无源(2012-2Pin)" BL-2012-2Pin 22.31,11.201 r180 top

## Footprints (in the part's own frame and the unit in brackets; to place one, negate y for a bottom-side part, rotate by r counter-clockwise, add the part's x,y. Pads: shape width x height; smd on the part's side, far side on the other; paste and mask are expansions set on the pad)
BL-1.27-1*25V [mm] "针?"
  oval 0.7x1.4 / inner oval 0.7x1.4 / far side oval 0.82x1.4 hole 0.635: 1(-15.24,0) 2(-13.97,0) 3(-12.7,0) 4(-11.43,0) 5(-10.16,0) 6(-8.89,0) 7(-7.62,0) 8(-6.35,0) 9(-5.08,0) 10(-3.81,0) 11(-2.54,0) 12(-1.27,0) 13(0,0) 14(1.27,0) 15(2.54,0) 16(3.81,0) 17(5.08,0) 18(6.35,0) 19(7.62,0) 20(8.89,0) 21(10.16,0) 22(11.43,0) 23(12.7,0) 24(13.97,0) 25(15.24,0)
  silkscreen extent -16,-1.27 16,1.27
BL-1.27-2*30V-4.3*2.8 [mil]
  rect 30x37 hole 25.59: 1(-725,-25)
  oval 30x37 hole 25.59: 2(-725,25) 3(-675,-25) 4(-675,25) 5(-625,-25) 6(-625,25) 7(-575,-25) 8(-575,25) 9(-525,-25) 10(-525,25) 11(-475,-25) 12(-475,25) 13(-425,-25) 14(-425,25) 15(-375,-25) 16(-375,25) 17(-325,-25) 18(-325,25) 19(-275,-25) 20(-275,25) 21(-225,-25) 22(-225,25) 23(-175,-25) 24(-175,25) 25(-125,-25) 26(-125,25) 27(-75,-25) 28(-75,25) 29(-25,-25) 30(-25,25) 31(25,-25) 32(25,25) 33(75,-25) 34(75,25) 35(125,-25) 36(125,25) 37(175,-25) 38(175,25) 39(225,-25) 40(225,25) 41(275,-25) 42(275,25) 43(325,-25) 44(325,25) 45(375,-25) 46(375,25) 47(425,-25) 48(425,25) 49(475,-25) 50(475,25) 51(525,-25) 52(525,25) 53(575,-25) 54(575,25) 55(625,-25) 56(625,25) 57(675,-25) 58(675,25) 59(725,-25) 60(725,25)
  Top Layer region: 740,-57.13 737,-60.13 714,-60.13 710,-56.13 710,-27.87 715.73,-22.13 735.5,-22.13 740,-26.63
  Top Layer region: 710,53 713,56 736,56 740,52 740,23.73 734.27,18 714.5,18 710,22.5
  Top Layer region: 690,-57.13 687,-60.13 664,-60.13 660,-56.13 660,-27.87 665.73,-22.13 685.5,-22.13 690,-26.63
  Top Layer region: 660,53 663,56 686,56 690,52 690,23.73 684.27,18 664.5,18 660,22.5
  Top Layer region: 640,-57.13 637,-60.13 614,-60.13 610,-56.13 610,-27.87 615.73,-22.13 635.5,-22.13 640,-26.63
  Top Layer region: 610,53 613,56 636,56 640,52 640,23.73 634.27,18 614.5,18 610,22.5
  Top Layer region: 590,-57.13 587,-60.13 564,-60.13 560,-56.13 560,-27.87 565.73,-22.13 585.5,-22.13 590,-26.63
  Top Layer region: 560,53 563,56 586,56 590,52 590,23.73 584.27,18 564.5,18 560,22.5
  Top Layer region: 540,-57.13 537,-60.13 514,-60.13 510,-56.13 510,-27.87 515.73,-22.13 535.5,-22.13 540,-26.63
  Top Layer region: 510,53 513,56 536,56 540,52 540,23.73 534.27,18 514.5,18 510,22.5
  Top Layer region: 490,-57.13 487,-60.13 464,-60.13 460,-56.13 460,-27.87 465.73,-22.13 485.5,-22.13 490,-26.63
  Top Layer region: 460,53 463,56 486,56 490,52 490,23.73 484.27,18 464.5,18 460,22.5
  Top Layer region: 440,-57.13 437,-60.13 414,-60.13 410,-56.13 410,-27.87 415.73,-22.13 435.5,-22.13 440,-26.63
  Top Layer region: 410,53 413,56 436,56 440,52 440,23.73 434.27,18 414.5,18 410,22.5
  Top Layer region: 390,-57.13 387,-60.13 364,-60.13 360,-56.13 360,-27.87 365.73,-22.13 385.5,-22.13 390,-26.63
  Top Layer region: 360,53 363,56 386,56 390,52 390,23.73 384.27,18 364.5,18 360,22.5
  Top Layer region: 340,-57.13 337,-60.13 314,-60.13 310,-56.13 310,-27.87 315.73,-22.13 335.5,-22.13 340,-26.63
  Top Layer region: 310,53 313,56 336,56 340,52 340,23.73 334.27,18 314.5,18 310,22.5
  Top Layer region: 290,-57.13 287,-60.13 264,-60.13 260,-56.13 260,-27.87 265.73,-22.13 285.5,-22.13 290,-26.63
  Top Layer region: 260,53 263,56 286,56 290,52 290,23.73 284.27,18 264.5,18 260,22.5
  Top Layer region: 240,-57.13 237,-60.13 214,-60.13 210,-56.13 210,-27.87 215.73,-22.13 235.5,-22.13 240,-26.63
  Top Layer region: 210,53 213,56 236,56 240,52 240,23.73 234.27,18 214.5,18 210,22.5
  Top Layer region: 190,-57.13 187,-60.13 164,-60.13 160,-56.13 160,-27.87 165.73,-22.13 185.5,-22.13 190,-26.63
  Top Layer region: 160,53 163,56 186,56 190,52 190,23.73 184.27,18 164.5,18 160,22.5
  Top Layer region: 140,-57.13 137,-60.13 114,-60.13 110,-56.13 110,-27.87 115.73,-22.13 135.5,-22.13 140,-26.63
  Top Layer region: 110,53 113,56 136,56 140,52 140,23.73 134.27,18 114.5,18 110,22.5
  Top Layer region: 90,-57.13 87,-60.13 64,-60.13 60,-56.13 60,-27.87 65.73,-22.13 85.5,-22.13 90,-26.63
  Top Layer region: 60,53 63,56 86,56 90,52 90,23.73 84.27,18 64.5,18 60,22.5
  Top Layer region: 40,-57.13 37,-60.13 14,-60.13 10,-56.13 10,-27.87 15.73,-22.13 35.5,-22.13 40,-26.63
  Top Layer region: 10,53 13,56 36,56 40,52 40,23.73 34.27,18 14.5,18 10,22.5
  Top Layer region: -10,-57.13 -13,-60.13 -36,-60.13 -40,-56.13 -40,-27.87 -34.27,-22.13 -14.5,-22.13 -10,-26.63
  Top Layer region: -40,53 -37,56 -14,56 -10,52 -10,23.73 -15.73,18 -35.5,18 -40,22.5
  Top Layer region: -60,-57.13 -63,-60.13 -86,-60.13 -90,-56.13 -90,-27.87 -84.27,-22.13 -64.5,-22.13 -60,-26.63
  Top Layer region: -90,53 -87,56 -64,56 -60,52 -60,23.73 -65.73,18 -85.5,18 -90,22.5
  Top Layer region: -110,-57.13 -113,-60.13 -136,-60.13 -140,-56.13 -140,-27.87 -134.27,-22.13 -114.5,-22.13 -110,-26.63
  Top Layer region: -140,53 -137,56 -114,56 -110,52 -110,23.73 -115.73,18 -135.5,18 -140,22.5
  Top Layer region: -160,-57.13 -163,-60.13 -186,-60.13 -190,-56.13 -190,-27.87 -184.27,-22.13 -164.5,-22.13 -160,-26.63
  Top Layer region: -190,53 -187,56 -164,56 -160,52 -160,23.73 -165.73,18 -185.5,18 -190,22.5
  Top Layer region: -210,-57.13 -213,-60.13 -236,-60.13 -240,-56.13 -240,-27.87 -234.27,-22.13 -214.5,-22.13 -210,-26.63
  Top Layer region: -240,53 -237,56 -214,56 -210,52 -210,23.73 -215.73,18 -235.5,18 -240,22.5
  Top Layer region: -260,-57.13 -263,-60.13 -286,-60.13 -290,-56.13 -290,-27.87 -284.27,-22.13 -264.5,-22.13 -260,-26.63
  Top Layer region: -290,53 -287,56 -264,56 -260,52 -260,23.73 -265.73,18 -285.5,18 -290,22.5
  Top Layer region: -310,-57.13 -313,-60.13 -336,-60.13 -340,-56.13 -340,-27.87 -334.27,-22.13 -314.5,-22.13 -310,-26.63
  Top Layer region: -340,53 -337,56 -314,56 -310,52 -310,23.73 -315.73,18 -335.5,18 -340,22.5
  Top Layer region: -360,-57.13 -363,-60.13 -386,-60.13 -390,-56.13 -390,-27.87 -384.27,-22.13 -364.5,-22.13 -360,-26.63
  Top Layer region: -390,53 -387,56 -364,56 -360,52 -360,23.73 -365.73,18 -385.5,18 -390,22.5
  Top Layer region: -410,-57.13 -413,-60.13 -436,-60.13 -440,-56.13 -440,-27.87 -434.27,-22.13 -414.5,-22.13 -410,-26.63
  Top Layer region: -440,53 -437,56 -414,56 -410,52 -410,23.73 -415.73,18 -435.5,18 -440,22.5
  Top Layer region: -460,-57.13 -463,-60.13 -486,-60.13 -490,-56.13 -490,-27.87 -484.27,-22.13 -464.5,-22.13 -460,-26.63
  Top Layer region: -490,53 -487,56 -464,56 -460,52 -460,23.73 -465.73,18 -485.5,18 -490,22.5
  Top Layer region: -510,-57.13 -513,-60.13 -536,-60.13 -540,-56.13 -540,-27.87 -534.27,-22.13 -514.5,-22.13 -510,-26.63
  Top Layer region: -540,53 -537,56 -514,56 -510,52 -510,23.73 -515.73,18 -535.5,18 -540,22.5
  Top Layer region: -560,-57.13 -563,-60.13 -586,-60.13 -590,-56.13 -590,-27.87 -584.27,-22.13 -564.5,-22.13 -560,-26.63
  Top Layer region: -590,53 -587,56 -564,56 -560,52 -560,23.73 -565.73,18 -585.5,18 -590,22.5
  Top Layer region: -610,-57.13 -613,-60.13 -636,-60.13 -640,-56.13 -640,-27.87 -634.27,-22.13 -614.5,-22.13 -610,-26.63
  Top Layer region: -640,53 -637,56 -614,56 -610,52 -610,23.73 -615.73,18 -635.5,18 -640,22.5
  Top Layer region: -660,-57.13 -663,-60.13 -686,-60.13 -690,-56.13 -690,-27.87 -684.27,-22.13 -664.5,-22.13 -660,-26.63
  Top Layer region: -690,53 -687,56 -664,56 -660,52 -660,23.73 -665.73,18 -685.5,18 -690,22.5
  Top Layer region: -740,53 -737,56 -714,56 -710,52 -710,23.73 -715.73,18 -735.5,18 -740,22.5
  Top Layer region: -710,-57.13 -713,-60.13 -736,-60.13 -740,-56.13 -740,-27.87 -734.27,-22.13 -714.5,-22.13 -710,-26.63
BL-2012-2Pin [mm]
  rect 0.8x1.1 smd paste+0 mask+0.051: 1(-0.8,0) 2(0.8,0)
  silkscreen extent -1.25,-0.71 1.25,0.71
BL-3225-4Pin [mm]
  rect 0.9x1.1 smd: 1(-0.9,1.2) 2(-0.9,-1.2) 3(0.9,-1.2) 4(0.9,1.2)
  silkscreen extent -1.7,-2.1 1.7,2.1
BL-C0402 [mm]
  rect 0.5x0.5 smd: 1(-0.5,0) 2(0.5,0)
  silkscreen extent -0.91,-0.41 0.91,0.41
BL-C0603 [mm]
  rect 0.8x0.8 smd: 1(-0.8,0) 2(0.8,0)
  silkscreen extent -1.4,-0.61 1.4,0.61
BL-C0805 [mm]
  rect 1.2x1.3 smd: 1(-1,0) 2(1,0)
  silkscreen extent -1.83,-0.89 1.83,0.89
BL-LED-0603 [mm]
  rect 1.1x1 smd: 1(-0.85,0) 2(0.85,0)
  silkscreen extent -1.65,-0.76 1.74,1.22
BL-NR4018T4R7M [mm]
  rect 1.2x3.7 smd: 1(-1.365,0) 2(1.365,0)
  silkscreen extent -2,-2.03 2,1.97
BL-R0402 [mm]
  rect 0.5x0.5 smd: 1(-0.5,0) 2(0.5,0)
  silkscreen extent -0.91,-0.41 0.91,0.41
BL-R0603 [mm]
  rect 0.8x0.96 smd: 1(-0.8,0) 2(0.8,0)
  silkscreen extent -1.4,-0.61 1.4,0.61
BL-R0805 [mm]
  rect 1.2x1.3 smd: 1(-1,0) 2(1,0)
  silkscreen extent -1.83,-0.89 1.83,0.89
MAPBGA196/0.65/10X10 [mm]
  round 0.3 smd: A1(-4.225,4.225) A2(-3.575,4.225) A3(-2.925,4.225) A4(-2.275,4.225) A5(-1.625,4.225) A6(-0.975,4.225) A7(-0.325,4.225) A8(0.325,4.225) A9(0.975,4.225) A10(1.625,4.225) A11(2.275,4.225) A12(2.925,4.225) A13(3.575,4.225) A14(4.225,4.225) B1(-4.225,3.575) B2(-3.575,3.575) B3(-2.925,3.575) B4(-2.275,3.575) B5(-1.625,3.575) B6(-0.975,3.575) B7(-0.325,3.575) B8(0.325,3.575) B9(0.975,3.575) B10(1.625,3.575) B11(2.275,3.575) B12(2.925,3.575) B13(3.575,3.575) B14(4.225,3.575) C1(-4.225,2.925) C2(-3.575,2.925) C3(-2.925,2.925) C4(-2.275,2.925) C5(-1.625,2.925) C6(-0.975,2.925) C7(-0.325,2.925) C8(0.325,2.925) C9(0.975,2.925) C10(1.625,2.925) C11(2.275,2.925) C12(2.925,2.925) C13(3.575,2.925) C14(4.225,2.925) D1(-4.225,2.275) D2(-3.575,2.275) D3(-2.925,2.275) D4(-2.275,2.275) D5(-1.625,2.275) D6(-0.975,2.275) D7(-0.325,2.275) D8(0.325,2.275) D9(0.975,2.275) D10(1.625,2.275) D11(2.275,2.275) D12(2.925,2.275) D13(3.575,2.275) D14(4.225,2.275) E1(-4.225,1.625) E2(-3.575,1.625) E3(-2.925,1.625) E4(-2.275,1.625) E5(-1.625,1.625) E6(-0.975,1.625) E7(-0.325,1.625) E8(0.325,1.625) E9(0.975,1.625) E10(1.625,1.625) E11(2.275,1.625) E12(2.925,1.625) E13(3.575,1.625) E14(4.225,1.625) F1(-4.225,0.975) F2(-3.575,0.975) F3(-2.925,0.975) F4(-2.275,0.975) F5(-1.625,0.975) F6(-0.975,0.975) F7(-0.325,0.975) F8(0.325,0.975) F9(0.975,0.975) F10(1.625,0.975) F11(2.275,0.975) F12(2.925,0.975) F13(3.575,0.975) F14(4.225,0.975) G1(-4.225,0.325) G2(-3.575,0.325) G3(-2.925,0.325) G4(-2.275,0.325) G5(-1.625,0.325) G6(-0.975,0.325) G7(-0.325,0.325) G8(0.325,0.325) G9(0.975,0.325) G10(1.625,0.325) G11(2.275,0.325) G12(2.925,0.325) G13(3.575,0.325) G14(4.225,0.325) H1(-4.225,-0.325) H2(-3.575,-0.325) H3(-2.925,-0.325) H4(-2.275,-0.325) H5(-1.625,-0.325) H6(-0.975,-0.325) H7(-0.325,-0.325) H8(0.325,-0.325) H9(0.975,-0.325) H10(1.625,-0.325) H11(2.275,-0.325) H12(2.925,-0.325) H13(3.575,-0.325) H14(4.225,-0.325) J1(-4.225,-0.975) J2(-3.575,-0.975) J3(-2.925,-0.975) J4(-2.275,-0.975) J5(-1.625,-0.975) J6(-0.975,-0.975) J7(-0.325,-0.975) J8(0.325,-0.975) J9(0.975,-0.975) J10(1.625,-0.975) J11(2.275,-0.975) J12(2.925,-0.975) J13(3.575,-0.975) J14(4.225,-0.975) K1(-4.225,-1.625) K2(-3.575,-1.625) K3(-2.925,-1.625) K4(-2.275,-1.625) K5(-1.625,-1.625) K6(-0.975,-1.625) K7(-0.325,-1.625) K8(0.325,-1.625) K9(0.975,-1.625) K10(1.625,-1.625) K11(2.275,-1.625) K12(2.925,-1.625) K13(3.575,-1.625) K14(4.225,-1.625) L1(-4.225,-2.275) L2(-3.575,-2.275) L3(-2.925,-2.275) L4(-2.275,-2.275) L5(-1.625,-2.275) L6(-0.975,-2.275) L7(-0.325,-2.275) L8(0.325,-2.275) L9(0.975,-2.275) L10(1.625,-2.275) L11(2.275,-2.275) L12(2.925,-2.275) L13(3.575,-2.275) L14(4.225,-2.275) M1(-4.225,-2.925) M2(-3.575,-2.925) M3(-2.925,-2.925) M4(-2.275,-2.925) M5(-1.625,-2.925) M6(-0.975,-2.925) M7(-0.325,-2.925) M8(0.325,-2.925) M9(0.975,-2.925) M10(1.625,-2.925) M11(2.275,-2.925) M12(2.925,-2.925) M13(3.575,-2.925) M14(4.225,-2.925) N1(-4.225,-3.575) N2(-3.575,-3.575) N3(-2.925,-3.575) N4(-2.275,-3.575) N5(-1.625,-3.575) N6(-0.975,-3.575) N7(-0.325,-3.575) N8(0.325,-3.575) N9(0.975,-3.575) N10(1.625,-3.575) N11(2.275,-3.575) N12(2.925,-3.575) N13(3.575,-3.575) N14(4.225,-3.575) P1(-4.225,-4.225) P2(-3.575,-4.225) P3(-2.925,-4.225) P4(-2.275,-4.225) P5(-1.625,-4.225) P6(-0.975,-4.225) P7(-0.325,-4.225) P8(0.325,-4.225) P9(0.975,-4.225) P10(1.625,-4.225) P11(2.275,-4.225) P12(2.925,-4.225) P13(3.575,-4.225) P14(4.225,-4.225)
  silkscreen extent -6.08,-5 5,5
SOIC8/1.27/8 [mm]
  rect 1.5x0.55 smd: 1(-4,1.905)
  oval 1.5x0.55 smd: 2(-4,0.635) 3(-4,-0.635) 4(-4,-1.905) 5(4,-1.905) 6(4,-0.635) 7(4,0.635) 8(4,1.905)
  silkscreen extent -6.1,-2.8 3,2.8
SOT-23-3 [mm]
  rect 0.9x1 smd: 1(-0.95,-1.15) 2(0.95,-1.15)
  rect 0.9x1.2 smd: 3(0,1.15)
  silkscreen extent -1.45,-1.28 1.45,1.15
TP-1.0MM [mm]
  oval 1.2x1 smd: 1(0,0)
  silkscreen extent -0.85,-0.85 0.85,0.85

## Part data
C1 C2 C3 C4 C5 C6 C7 C8 C9 C10 C11 C12 C13 C14 C15 C16 C17 C18 C19 C20 C21 C22 C23 C24 C25 C26 C27 C28 C29 C30 C31 C32 C33 C34 C35 C36 C37 C38 C39 C40 C41 C42 C43 C44 C45 C46 C47 C48 C49 C50 C51 C52 C53 C60: library part CAP, "Capacitor"
GPANIO1: library part TP
J1 J2: library part 1.27-2*30V-4.3*2.8
J3: library part 1.27-1*25V-4.3*2.8
LED1 LED2: library part LED
R1 R2 R3 R4 R5 R6 R7 R8 R9 R10 R11 R12 R13 R14 R15 R16 R17 R18 R19 R20 R21 R22 R23 R24 R25 R26 R27 R28 R29 R30 R31 R32 R33 R34 R35 R36 R37: library part RES2
U1: library part IMX6_BGA_196P, "IC CPU ARM Cortex-M7 600MHZ 1.3V MAPBGA196"
U2: library part SGM803_SOT23-3P, "IC VOLT MONITOR 2.63V RST VTH 1-5.5V AUTO SOT-23"
U3: library part 25WP_8P, "IC MEM FLASH QPI 64Mb 1.65-1.95V SOIC8W"
Y1: library part 无源贴
Y2: library part CRYSTAL, "XTAL 32.768KHZ 7PF 20PPM -- SMT"

## Free pads (board coordinates)
  round 1 smd paste+0.5: 0(6.912,36.554) 0(33.53,12.595)
  round 1 smd far side paste+0.5: 0(6.912,36.554) 0(36.07,9.42)

## Via types
v1: diameter 0.508, hole 0.254, Top Layer to Bottom Layer, tented both sides, 169 vias
v2: diameter 0.406, hole 0.203, Top Layer to Bottom Layer, tented both sides, 78 vias
v3: diameter 0.356, hole 0.203, Top Layer to Bottom Layer, tented both sides, 42 vias
v4: diameter 0.7, hole 0.4, Top Layer to Bottom Layer, tented both sides, 1 vias

## Nets (pads, with @x,y where several pads share a name; then routed paths per layer and width w, separated by ;. In a path a pad name is that pad's centre, name@x,y a point inside that pad or via, vN(x,y) a via of type N, cw(c..) or ccw(c..) an arc to the next point about the centre after c; other vN are vias at no path point)
5V_USB_OTG1_VBUS: J3.21 R22.1 | length 19.4
  Top Layer w0.457: R22.1@17.512,11.286 17.512,10.775 17.951,10.336 18.696,10.336 22.327,6.706 v1(23.114,6.706) v1(23.546,6.274)
  L4 w0.457: v1(23.114,6.706) 25.959,3.861 30.759,3.861 31.589,3.031 J3.21@31.589,2.008
5V_USB_OTG2_VBUS: J3.22 R10.1 R23.1 | length 20.7
  Top Layer w0.457: R23.1@18.528,11.286 18.915,11.286 22.716,7.485 24.258,7.485 25.857,5.886 25.857,4.674 26.67,3.861 31.199,3.861 ; R10.1@31.519,4.804 31.519,4.181 ; J3.22@32.859,2.008 32.859,2.718 31.716,3.861 31.471,3.861 ; 31.199,3.861 31.519,4.181 ; 31.199,3.861 31.471,3.861 ; 31.471,3.861 31.519,3.909 31.519,4.181
A2: J2.28 U1.A2 | length 17.6
  Top Layer w0.127: J2.28@3.635,22.405 4.326,22.405 ; J2.28@3.986,22.225 cw(c4.326,21.993) 4.326,22.405 ; J2.28@3.986,22.584 ccw(c4.326,22.816) 4.326,22.405 ; U1.A2@17.839,25.594 ccw(c17.63,25.594) 17.777,25.741 ccw(c17.925,25.889) U1.A2@17.925,25.68 ; U1.A2@17.925,25.594 16.832,26.687 8.608,26.687 4.326,22.405
A3: J2.26 U1.A3 | length 18.7
  Top Layer w0.127: J2.26@3.635,23.675 4.25,23.675 ; J2.26@4.005,23.527 cw(c4.25,23.398) 4.25,23.675 ; J2.26@4.005,23.822 ccw(c4.25,23.951) 4.25,23.675 ; U1.A3@18.514,25.655 ccw(c18.366,25.802) 18.575,25.802 ccw(c18.784,25.802) U1.A3@18.636,25.655 ; U1.A3@18.575,25.594 18.575,26.039 16.896,27.718 8.293,27.718 4.25,23.675
A4: J2.24 U1.A4 | length 25.2
  Top Layer w0.127: J2.24@3.635,24.945 4.142,24.945 ; J2.24@3.724,24.754 ccw(c3.724,25.304) 4.112,24.915 ; J2.24@3.724,24.881 ccw(c3.724,25.737) 4.329,25.132 ; J2.24@3.724,25.008 ccw(c3.724,26.171) 4.546,25.349 ; J2.24@3.724,25.135 ccw(c3.724,26.604) 4.763,25.565 ; J2.24@3.724,25.262 ccw(c3.724,27.038) 4.98,25.782 ; J2.24@4.03,24.859 cw(c4.142,24.828) 4.142,24.945 ; J2.24@4.03,25.03 ccw(c4.142,25.061) 4.142,24.945 ; U1.A4@19.164,25.655 ccw(c19.016,25.802) 19.225,25.802 ccw(c19.434,25.802) U1.A4@19.286,25.655 ; U1.A4@19.225,25.594 19.225,26.485 15.738,29.972 9.169,29.972 4.142,24.945
A5: J2.15 U1.A5 | length 22.3
  Top Layer w0.127: J2.15@2.365,30.025 3,30.66 ; J2.15@2.454,30.342 ccw(c2.454,30.894) 2.844,30.504 ; J2.15@2.644,30.038 cw(c3.19,30.076) 2.803,30.462 ; J2.15@2.771,30.047 cw(c3.558,30.101) 3,30.66 ; U1.A5@19.814,25.655 ccw(c19.666,25.802) 19.875,25.802 ccw(c20.084,25.802) U1.A5@19.936,25.655 ; U1.A5@19.875,25.594 19.875,26.465 15.68,30.66 3,30.66
A6: J2.13 U1.A6 | length 23.7
  Top Layer w0.127: J2.13@2.365,31.295 3,31.93 ; J2.13@2.454,31.612 ccw(c2.454,32.164) 2.844,31.774 ; J2.13@2.644,31.308 cw(c3.19,31.346) 2.803,31.732 ; J2.13@2.771,31.317 cw(c3.558,31.371) 3,31.93 ; U1.A6@20.464,25.655 ccw(c20.316,25.802) 20.525,25.802 ccw(c20.734,25.802) U1.A6@20.586,25.655 ; U1.A6@20.525,25.594 20.525,26.909 15.504,31.93 3,31.93
A7: J2.11 U1.A7 | length 27.5
  Top Layer w0.127: J2.11@2.365,32.565 3,33.2 ; J2.11@2.454,32.882 ccw(c2.454,33.434) 2.844,33.044 ; J2.11@2.644,32.578 cw(c3.19,32.616) 2.803,33.002 ; J2.11@2.771,32.587 cw(c3.558,32.641) 3,33.2 ; U1.A7@21.175,25.594 21.5,25.919 21.5,30.628 18.928,33.2 3,33.2 ; U1.A7@21.175,25.68 ccw(c21.175,25.889) 21.323,25.741 ccw(c21.47,25.594) U1.A7@21.262,25.594
A8: J2.10 U1.A8 | length 26.9
  Top Layer w0.127: J2.10@3.635,33.835 18.818,33.835 21.825,30.828 U1.A8@21.825,25.594 ; J2.10@3.859,33.7 cw(c4.184,33.375) 4.184,33.835 cw(c4.184,34.295) J2.10@3.859,33.969 ; J2.10@3.948,33.61 cw(c4.49,33.068) 4.49,33.835 cw(c4.49,34.601) J2.10@3.948,34.059 ; U1.A8@21.764,25.655 ccw(c21.616,25.802) 21.825,25.802 ccw(c22.034,25.802) U1.A8@21.886,25.655
A9: J1.53 U1.A9 | length 26.7
  Top Layer w0.127: U1.A9@22.414,25.655 ccw(c22.266,25.802) 22.475,25.802 ccw(c22.684,25.802) U1.A9@22.536,25.655 ; U1.A9@22.475,25.594 22.475,29.231 28.981,35.738 40.002,35.738 ; 40.156,35.584 ccw(c40.546,35.974) J1.53@40.546,35.423 ; 40.199,35.541 cw(c39.815,35.158) J1.53@40.356,35.119 ; J1.53@40.229,35.128 ccw(c39.449,35.184) 40.002,35.738 ; J1.53@40.635,35.105 40.002,35.738
A10: J1.51 U1.A10 | length 24.8
  Top Layer w0.127: U1.A10@23.064,25.655 ccw(c22.916,25.802) 23.125,25.802 ccw(c23.334,25.802) U1.A10@23.186,25.655 ; U1.A10@23.125,25.594 23.125,28.084 29.508,34.468 40.002,34.468 ; 40.156,34.314 ccw(c40.546,34.704) J1.51@40.546,34.153 ; 40.199,34.271 cw(c39.815,33.888) J1.51@40.356,33.849 ; J1.51@40.229,33.858 ccw(c39.449,33.914) 40.002,34.468 ; J1.51@40.635,33.835 40.002,34.468
A11_ENET2_RXER: J1.52 U1.A11 | length 24.6
  Top Layer w0.127: U1.A11@23.714,25.655 ccw(c23.566,25.802) 23.775,25.802 ccw(c23.984,25.802) U1.A11@23.836,25.655 ; U1.A11@23.775,25.594 23.775,27.844 29.766,33.835 31.817,33.835 cw(c31.817,33.559) 32.093,33.559 32.093,33.531 ccw(c32.368,33.531) 32.368,33.256 32.605,33.256 ccw(c32.605,33.531) 32.88,33.531 32.88,33.559 cw(c33.156,33.559) 33.156,33.835 33.392,33.835 cw(c33.392,33.559) 33.668,33.559 33.668,33.531 ccw(c33.943,33.531) 33.943,33.256 34.18,33.256 ccw(c34.18,33.531) 34.455,33.531 34.455,33.559 cw(c34.731,33.559) 34.731,33.835 34.967,33.835 cw(c34.967,33.559) 35.242,33.559 35.242,33.531 ccw(c35.518,33.531) 35.518,33.256 35.754,33.256 ccw(c35.754,33.531) 36.03,33.531 36.03,33.559 cw(c36.305,33.559) 36.305,33.835 J1.52@39.365,33.835 ; J1.52@39.052,33.61 ccw(c38.51,33.068) 38.51,33.835 ccw(c38.51,34.602) J1.52@39.052,34.06 ; J1.52@39.141,33.7 ccw(c38.816,33.375) 38.816,33.835 ccw(c38.816,34.295) J1.52@39.141,33.97
A12_RMII1-TXD1: J1.44 U1.A12 | length 20.7
  Top Layer w0.127: U1.A12@24.364,25.655 ccw(c24.216,25.802) 24.425,25.802 ccw(c24.634,25.802) U1.A12@24.486,25.655 ; U1.A12@24.425,25.594 24.425,26.98 26.2,28.755 26.737,28.755 ccw(c26.737,29.031) 27.013,29.031 27.013,29.073 cw(c27.288,29.073) 27.288,29.349 27.525,29.349 cw(c27.525,29.073) 27.8,29.073 27.8,29.031 ccw(c28.076,29.031) 28.076,28.755 28.312,28.755 ccw(c28.312,29.031) 28.588,29.031 28.588,29.073 cw(c28.863,29.073) 28.863,29.349 29.1,29.349 cw(c29.1,29.073) 29.375,29.073 29.375,29.031 ccw(c29.651,29.031) 29.651,28.755 J1.44@39.365,28.755 ; J1.44@39.052,28.53 ccw(c38.51,27.988) 38.51,28.755 ccw(c38.51,29.522) J1.44@39.052,28.98 ; J1.44@39.141,28.62 ccw(c38.816,28.295) 38.816,28.755 ccw(c38.816,29.215) J1.44@39.141,28.89
A13_RMII1-TX_EN: J1.42 U1.A13 | length 20.8
  Top Layer w0.127: U1.A13@25.014,25.655 ccw(c24.866,25.802) 25.075,25.802 ccw(c25.284,25.802) U1.A13@25.136,25.655 ; U1.A13@25.075,25.594 25.075,26.259 26.301,27.485 27.542,27.485 cw(c27.542,27.227) 27.8,27.227 ccw(c28.076,27.227) 28.076,26.952 28.312,26.952 ccw(c28.312,27.227) 28.588,27.227 cw(c28.846,27.227) 28.846,27.485 29.117,27.485 cw(c29.117,27.227) 29.375,27.227 ccw(c29.651,27.227) 29.651,26.952 29.887,26.952 ccw(c29.887,27.227) 30.162,27.227 cw(c30.42,27.227) 30.42,27.485 30.692,27.485 cw(c30.692,27.227) 30.95,27.227 ccw(c31.225,27.227) 31.225,26.952 31.462,26.952 ccw(c31.462,27.227) 31.737,27.227 cw(c31.995,27.227) 31.995,27.485 32.267,27.485 cw(c32.267,27.227) 32.525,27.227 ccw(c32.8,27.227) 32.8,26.952 33.037,26.952 ccw(c33.037,27.227) 33.312,27.227 cw(c33.57,27.227) 33.57,27.485 33.842,27.485 cw(c33.842,27.227) 34.099,27.227 ccw(c34.375,27.227) 34.375,26.952 34.611,26.952 ccw(c34.611,27.227) 34.887,27.227 cw(c35.145,27.227) 35.145,27.485 J1.42@39.365,27.485 ; J1.42@39.052,27.26 ccw(c38.51,26.718) 38.51,27.485 ccw(c38.51,28.252) J1.42@39.052,27.71 ; J1.42@39.141,27.35 ccw(c38.816,27.025) 38.816,27.485 ccw(c38.816,27.945) J1.42@39.141,27.62
B1: J2.30 U1.B1 | length 17
  Top Layer w0.127: J2.30@3.635,21.135 4.377,21.135 ; J2.30@3.874,21.017 cw(c4.116,20.827) 4.116,21.135 cw(c4.116,21.442) J2.30@3.874,21.252 ; J2.30@3.974,20.939 cw(c4.377,20.623) 4.377,21.135 ; J2.30@3.974,21.331 ccw(c4.377,21.647) 4.377,21.135 ; U1.B1@17.214,24.882 ccw(c17.066,24.735) 17.066,24.944 ccw(c17.066,25.152) U1.B1@17.214,25.005 ; U1.B1@17.275,24.944 8.186,24.944 4.377,21.135
B2: J2.29 U1.B2 | length 19.3
  Top Layer w0.127: J2.29@2.365,21.135 2.984,21.754 ; J2.29@2.454,21.452 ccw(c2.454,22.004) 2.844,21.614 ; J2.29@2.644,21.152 cw(c3.157,21.198) 2.792,21.562 ; J2.29@2.77,21.163 cw(c3.509,21.23) 2.984,21.754 ; U1.B2@17.839,24.944 ccw(c17.63,24.944) 17.777,25.091 ccw(c17.925,25.239) U1.B2@17.925,25.03 ; U1.B2@17.925,24.944 17.6,25.269 7.901,25.269 4.386,21.754 2.984,21.754
B3: J2.27 U1.B3 | length 21.3
  Top Layer w0.127: J2.27@2.365,22.405 3.019,23.058 ; J2.27@2.454,22.722 ccw(c2.454,23.274) 2.844,22.884 ; J2.27@2.644,22.413 cw(c3.23,22.44) 2.815,22.855 ; J2.27@2.771,22.419 cw(c3.619,22.458) 3.019,23.058 ; 18.25,25.816 16.99,27.076 8.526,27.076 4.508,23.058 3.019,23.058 ; 18.25,25.819 18.25,25.269 U1.B3@18.575,24.944 ; U1.B3@18.489,24.944 ccw(c18.28,24.944) 18.427,25.091 ccw(c18.575,25.239) U1.B3@18.575,25.03
B4: J2.25 U1.B4 | length 23.7
  Top Layer w0.127: J2.25@2.365,23.675 2.992,24.302 ; J2.25@2.454,23.992 ccw(c2.454,24.544) 2.844,24.154 ; J2.25@2.644,23.69 cw(c3.173,23.732) 2.798,24.107 ; J2.25@2.77,23.7 cw(c3.533,23.761) 2.992,24.302 ; U1.B4@19.139,24.944 ccw(c18.93,24.944) 19.077,25.091 ccw(c19.225,25.239) U1.B4@19.225,25.03 ; U1.B4@19.225,24.944 18.9,25.269 18.9,26.262 15.622,29.54 9.635,29.54 4.396,24.302 2.992,24.302
B6: J2.14 U1.B6 | length 22.6
  Top Layer w0.127: J2.14@3.635,31.295 15.627,31.295 20.2,26.722 20.2,25.269 U1.B6@20.525,24.944 ; J2.14@3.859,31.16 cw(c4.184,30.835) 4.184,31.295 cw(c4.184,31.755) J2.14@3.859,31.429 ; J2.14@3.948,31.07 cw(c4.49,30.528) 4.49,31.295 cw(c4.49,32.061) J2.14@3.948,31.519 ; U1.B6@20.439,24.944 ccw(c20.23,24.944) 20.377,25.091 ccw(c20.525,25.239) U1.B6@20.525,25.03
B7_SAI3_TX_SYNC: C43.2 J2.12 U1.B7 | length 26.5
  Top Layer w0.127: J2.12@3.635,32.565 15.568,32.565 20.415,27.718 ; J2.12@3.859,32.43 cw(c4.184,32.105) 4.184,32.565 cw(c4.184,33.025) J2.12@3.859,32.699 ; J2.12@3.948,32.34 cw(c4.49,31.798) 4.49,32.565 cw(c4.49,33.331) J2.12@3.948,32.789 ; C43.2@20.715,27.589 ccw(c20.415,27.304) 20.415,27.718 ; C43.2@20.715,27.847 cw(c20.415,28.132) 20.415,27.718 ; U1.B7@21.089,24.944 ccw(c20.88,24.944) 21.027,25.091 ccw(c21.175,25.239) U1.B7@21.175,25.03 ; U1.B7@21.175,24.944 20.85,25.269 20.85,26.614 C43.2@20.85,27.718 20.415,27.718 ; 20.85,27.268 cw(c21.3,27.268) 20.982,27.586 ccw(c21.3,27.268) 20.85,27.268 ; 20.85,27.268 ccw(c20.4,27.268) 20.718,27.586 cw(c20.4,27.268) 20.85,27.268
B8_LPI2C2_SDA: J1.56 U1.B8 | length 27.4
  Top Layer w0.127: U1.B8@21.825,24.944 22.15,25.269 22.15,30.105 28.42,36.375 J1.56@39.365,36.375 ; U1.B8@21.825,25.03 ccw(c21.825,25.239) 21.973,25.091 ccw(c22.12,24.944) U1.B8@21.912,24.944 ; J1.56@39.052,36.15 ccw(c38.51,35.608) 38.51,36.375 ccw(c38.51,37.142) J1.56@39.052,36.6 ; J1.56@39.141,36.24 ccw(c38.816,35.915) 38.816,36.375 ccw(c38.816,36.835) J1.56@39.141,36.51
B9: J1.54 U1.B9 | length 25.3
  Top Layer w0.127: U1.B9@22.475,24.944 22.8,25.269 22.8,28.642 29.263,35.105 J1.54@39.365,35.105 ; U1.B9@22.475,25.03 ccw(c22.475,25.239) 22.623,25.091 ccw(c22.77,24.944) U1.B9@22.562,24.944 ; J1.54@39.052,34.88 ccw(c38.51,34.338) 38.51,35.105 ccw(c38.51,35.872) J1.54@39.052,35.33 ; J1.54@39.141,34.97 ccw(c38.816,34.645) 38.816,35.105 ccw(c38.816,35.565) J1.54@39.141,35.24
B11_RMII2-RXD0: J1.49 U1.B11 | length 24.3
  Top Layer w0.127: U1.B11@23.775,24.944 24.1,25.269 24.1,27.453 28.931,32.283 30.725,32.283 cw(c30.725,32.008) 31.001,32.008 ccw(c31.276,32.008) 31.276,31.732 31.513,31.732 ccw(c31.513,32.008) 31.788,32.008 cw(c32.064,32.008) 32.064,32.283 37.694,32.283 38.608,33.198 40.002,33.198 ; U1.B11@23.775,25.03 ccw(c23.775,25.239) 23.923,25.091 ccw(c24.07,24.944) U1.B11@23.862,24.944 ; 40.156,33.044 ccw(c40.546,33.434) J1.49@40.546,32.883 ; 40.199,33.001 cw(c39.815,32.618) J1.49@40.356,32.579 ; J1.49@40.229,32.588 ccw(c39.449,32.644) 40.002,33.198 ; J1.49@40.635,32.565 40.002,33.198
B12_RMII1-TXD0: J1.41 U1.B12 | length 20.4
  Top Layer w0.127: U1.B12@24.425,24.944 24.75,25.269 24.75,26.512 26.356,28.118 40.002,28.118 ; U1.B12@24.425,25.03 ccw(c24.425,25.239) 24.573,25.091 ccw(c24.72,24.944) U1.B12@24.512,24.944 ; 40.156,27.964 ccw(c40.546,28.354) J1.41@40.546,27.803 ; 40.199,27.921 cw(c39.815,27.538) J1.41@40.356,27.499 ; J1.41@40.229,27.508 ccw(c39.449,27.564) 40.002,28.118 ; J1.41@40.635,27.485 40.002,28.118
B13_RMII1-REF_CLK: J1.39 U1.B13 | length 20.4
  Top Layer w0.127: U1.B13@25.075,24.944 25.4,25.269 25.4,25.906 25.898,26.404 35.373,26.404 ccw(c35.373,26.679) 35.649,26.679 35.649,26.683 cw(c35.924,26.683) 35.924,26.958 36.161,26.958 cw(c36.161,26.683) 36.436,26.683 36.436,26.125 ccw(c36.712,26.125) 36.712,25.85 36.948,25.85 ccw(c36.948,26.125) 37.224,26.125 37.224,26.128 cw(c37.499,26.128) 37.499,26.404 38.062,26.404 38.506,26.848 40.002,26.848 ; U1.B13@25.075,25.03 ccw(c25.075,25.239) 25.223,25.091 ccw(c25.37,24.944) U1.B13@25.162,24.944 ; 40.156,26.694 ccw(c40.546,27.084) J1.39@40.546,26.533 ; 40.199,26.651 cw(c39.815,26.268) J1.39@40.356,26.229 ; J1.39@40.229,26.238 ccw(c39.449,26.294) 40.002,26.848 ; J1.39@40.635,26.215 40.002,26.848
B14_ETH1-MDIO: J1.35 U1.B14 | length 18.1
  Top Layer w0.127: U1.B14@25.725,24.944 26.6,25.819 34.595,25.819 35.166,25.248 37.668,25.248 38.608,24.308 40.002,24.308 ; U1.B14@25.725,25.03 ccw(c25.725,25.239) 25.873,25.091 ccw(c26.02,24.944) U1.B14@25.812,24.944 ; 40.156,24.154 ccw(c40.546,24.544) J1.35@40.546,23.993 ; 40.199,24.111 cw(c39.815,23.728) J1.35@40.356,23.689 ; J1.35@40.229,23.698 ccw(c39.449,23.754) 40.002,24.308 ; J1.35@40.635,23.675 40.002,24.308
C1: J2.32 U1.C1 | length 16.5
  Top Layer w0.127: J2.32@3.708,19.865 4.303,19.865 ; J2.32@3.992,19.694 cw(c4.303,19.495) 4.303,19.865 ; J2.32@3.992,20.035 ccw(c4.303,20.234) 4.303,19.865 ; U1.C1@17.214,24.232 ccw(c17.066,24.085) 17.066,24.294 ccw(c17.066,24.502) U1.C1@17.214,24.355 ; U1.C1@17.275,24.294 8.732,24.294 4.303,19.865
C2: J2.31 U1.C2 | length 19.6
  Top Layer w0.127: J2.31@2.365,19.865 3.015,20.515 ; J2.31@2.454,20.182 ccw(c2.454,20.734) 2.844,20.344 ; J2.31@2.644,19.874 cw(c3.222,19.903) 2.813,20.312 ; J2.31@2.771,19.881 cw(c3.607,19.923) 3.015,20.515 ; U1.C2@17.839,24.294 ccw(c17.63,24.294) 17.777,24.441 ccw(c17.925,24.589) U1.C2@17.925,24.38 ; U1.C2@17.925,24.294 17.6,24.619 8.47,24.619 4.366,20.515 3.015,20.515
C3_SAI3_TX_DATA: J2.17 U1.C3 | length 21.4
  Top Layer w0.127: v3@18.25,24.504 cw(c18.25,24.228) 18.445,24.423 cw(c18.64,24.619) v3@18.364,24.619 ; v3(18.25,24.619) U1.C3@18.575,24.294 ; U1.C3@18.489,24.294 ccw(c18.28,24.294) 18.427,24.441 ccw(c18.575,24.589) U1.C3@18.575,24.38
  L3 w0.127: J2.17@2.365,28.755 3,29.39 ; J2.17@2.454,29.072 ccw(c2.454,29.624) 2.844,29.234 ; J2.17@2.644,28.768 cw(c3.19,28.806) 2.803,29.192 ; J2.17@2.771,28.777 cw(c3.558,28.831) 3,29.39 ; v3@18.169,24.538 ccw(c17.974,24.343) 17.974,24.619 ccw(c17.974,24.895) v3@18.169,24.699 ; v3(18.25,24.619) 11.976,24.619 7.205,29.39 3,29.39
C4_SAI3_RX_DATA: J2.16 U1.C4 | length 22.3
  Top Layer w0.127: v2@18.889,24.479 cw(c18.864,24.15) U1.C4@19.15,24.315 ; v2@18.9,24.479 cw(c18.9,24.142) 19.138,24.38 cw(c19.377,24.619) v2@19.04,24.619 ; v2(18.9,24.619) U1.C4@19.225,24.294 ; v2@18.93,24.482 cw(c18.963,24.332) 19.096,24.409 ; v2@19.036,24.589 ccw(c19.187,24.556) 19.11,24.423 ; v2@19.039,24.629 ccw(c19.368,24.654) U1.C4@19.203,24.368 ; U1.C4@19.139,24.294 ccw(c18.93,24.294) 19.077,24.441 ccw(c19.225,24.589) U1.C4@19.225,24.38
  L3 w0.127: J2.16@3.635,30.025 7.4,30.025 12.309,25.116 18.403,25.116 v2(18.9,24.619) ; J2.16@3.859,29.89 cw(c4.184,29.565) 4.184,30.025 cw(c4.184,30.485) J2.16@3.859,30.159 ; J2.16@3.948,29.8 cw(c4.49,29.258) 4.49,30.025 cw(c4.49,30.791) J2.16@3.948,30.249 ; v2@18.76,24.619 ccw(c18.423,24.619) 18.662,24.857 ccw(c18.9,25.096) v2@18.9,24.758
C5: J2.9 U1.C5 | length 26.3
  Top Layer w0.127: v2@19.539,24.479 cw(c19.514,24.15) U1.C5@19.8,24.315 ; v2@19.55,24.479 cw(c19.55,24.142) 19.788,24.38 cw(c20.027,24.619) v2@19.69,24.619 ; v2(19.55,24.619) U1.C5@19.875,24.294 ; v2@19.58,24.482 cw(c19.613,24.332) 19.746,24.409 ; v2@19.686,24.589 ccw(c19.837,24.556) 19.76,24.423 ; v2@19.689,24.629 ccw(c20.018,24.654) U1.C5@19.853,24.368 ; U1.C5@19.789,24.294 ccw(c19.58,24.294) 19.727,24.441 ccw(c19.875,24.589) U1.C5@19.875,24.38
  L3 w0.127: J2.9@2.365,33.835 3,34.47 ; J2.9@2.454,34.152 ccw(c2.454,34.704) 2.844,34.314 ; J2.9@2.644,33.848 cw(c3.19,33.886) 2.803,34.272 ; J2.9@2.771,33.857 cw(c3.558,33.911) 3,34.47 ; 19.22,25.078 cw(c18.761,24.619) v2@19.41,24.619 ; 19.437,24.861 cw(c19.195,24.619) v2@19.537,24.619 ; v2(19.55,24.619) 19.55,24.748 9.828,34.47 3,34.47
C6: J2.8 U1.C6 | length 26.2
  Top Layer w0.127: v2@20.189,24.479 cw(c20.164,24.15) U1.C6@20.45,24.315 ; v2@20.2,24.479 cw(c20.2,24.142) 20.438,24.38 cw(c20.677,24.619) v2@20.34,24.619 ; v2(20.2,24.619) U1.C6@20.525,24.294 ; v2@20.23,24.482 cw(c20.263,24.332) 20.396,24.409 ; v2@20.336,24.589 ccw(c20.487,24.556) 20.41,24.423 ; v2@20.339,24.629 ccw(c20.668,24.654) U1.C6@20.503,24.368 ; U1.C6@20.439,24.294 ccw(c20.23,24.294) 20.377,24.441 ccw(c20.525,24.589) U1.C6@20.525,24.38
  L3 w0.127: J2.8@3.635,35.105 10.605,35.105 20.2,25.51 v2(20.2,24.619) ; J2.8@3.859,34.97 cw(c4.184,34.645) 4.184,35.105 cw(c4.184,35.565) J2.8@3.859,35.239 ; J2.8@3.948,34.88 cw(c4.49,34.338) 4.49,35.105 cw(c4.49,35.871) J2.8@3.948,35.329 ; v2@20.101,24.717 ccw(c19.863,24.956) 20.2,24.956 ccw(c20.537,24.956) v2@20.299,24.717
C7: J2.7 U1.C7 | length 28.3
  Top Layer w0.127: v2@20.839,24.479 cw(c20.814,24.15) U1.C7@21.1,24.315 ; v2@20.85,24.479 cw(c20.85,24.142) 21.088,24.38 cw(c21.327,24.619) v2@20.99,24.619 ; v2(20.85,24.619) U1.C7@21.175,24.294 ; v2@20.88,24.482 cw(c20.913,24.332) 21.046,24.409 ; v2@20.986,24.589 ccw(c21.137,24.556) 21.06,24.423 ; v2@20.989,24.629 ccw(c21.318,24.654) U1.C7@21.153,24.368 ; U1.C7@21.089,24.294 ccw(c20.88,24.294) 21.027,24.441 ccw(c21.175,24.589) U1.C7@21.175,24.38
  L3 w0.127: J2.7@2.365,35.105 3,35.74 ; J2.7@2.454,35.422 ccw(c2.454,35.974) 2.844,35.584 ; J2.7@2.644,35.118 cw(c3.19,35.156) 2.803,35.542 ; J2.7@2.771,35.127 cw(c3.558,35.181) 3,35.74 ; v2@20.751,24.717 ccw(c20.513,24.956) 20.85,24.956 ccw(c21.187,24.956) v2@20.949,24.717 ; v2(20.85,24.619) 20.85,25.49 10.6,35.74 3,35.74
C8_LPI2C2_SCL: J2.4 U1.C8 | length 29.7
  Top Layer w0.127: U1.C8@21.825,24.294 v2(22.15,24.619) ; U1.C8@21.825,24.38 ccw(c21.825,24.589) 21.973,24.441 ccw(c22.12,24.294) U1.C8@21.912,24.294 ; U1.C8@21.847,24.368 ccw(c21.682,24.654) v2@22.011,24.629 ; U1.C8@21.9,24.315 cw(c22.186,24.15) v2@22.161,24.479 ; 21.94,24.423 ccw(c21.863,24.556) v2@22.014,24.589 ; 21.954,24.409 cw(c22.087,24.332) v2@22.12,24.482 ; v2@22.01,24.619 cw(c21.673,24.619) 21.912,24.38 cw(c22.15,24.142) v2@22.15,24.479
  L3 w0.127: J2.4@3.635,37.645 10.742,37.645 22.15,26.237 v2(22.15,24.619) ; J2.4@3.859,37.51 cw(c4.184,37.185) 4.184,37.645 cw(c4.184,38.105) J2.4@3.859,37.779 ; J2.4@3.948,37.42 cw(c4.49,36.878) 4.49,37.645 cw(c4.49,38.411) J2.4@3.948,37.869 ; v2@22.051,24.717 ccw(c21.813,24.956) 22.15,24.956 ccw(c22.487,24.956) v2@22.249,24.717
C9: J2.3 U1.C9 | length 32.2
  Top Layer w0.127: U1.C9@22.475,24.294 v3(22.8,24.619) ; U1.C9@22.475,24.38 ccw(c22.475,24.589) 22.623,24.441 ccw(c22.77,24.294) U1.C9@22.562,24.294 ; v3@22.686,24.619 cw(c22.41,24.619) 22.605,24.423 cw(c22.8,24.228) v3@22.8,24.504
  L3 w0.127: J2.3@2.365,37.645 3,38.28 ; J2.3@2.454,37.962 ccw(c2.454,38.514) 2.844,38.124 ; J2.3@2.644,37.658 cw(c3.19,37.696) 2.803,38.082 ; J2.3@2.771,37.667 cw(c3.558,37.721) 3,38.28 ; v3@22.719,24.699 ccw(c22.524,24.895) 22.8,24.895 ccw(c23.076,24.895) v3@22.881,24.699 ; v3(22.8,24.619) 22.8,28.998 13.519,38.28 3,38.28
C10_RMII2-TXD0: J1.50 U1.C10 | length 25.5
  Top Layer w0.127: U1.C10@23.125,24.294 v3(23.45,24.619) ; U1.C10@23.125,24.38 ccw(c23.125,24.589) 23.273,24.441 ccw(c23.42,24.294) U1.C10@23.212,24.294 ; v3@23.336,24.619 cw(c23.06,24.619) 23.255,24.423 cw(c23.45,24.228) v3@23.45,24.504
  L3 w0.127: v3@23.336,24.619 ccw(c23.06,24.619) 23.255,24.814 ccw(c23.45,25.009) v3@23.45,24.733 ; v3(23.45,24.619) 23.082,24.987 23.082,27.15 28.496,32.565 30.014,32.565 ccw(c30.014,32.841) 30.289,32.841 30.29,32.88 cw(c30.565,32.88) 30.565,33.155 30.801,33.155 cw(c30.801,32.88) 31.077,32.88 31.077,32.841 ccw(c31.352,32.841) 31.352,32.565 J1.50@39.365,32.565 ; J1.50@39.052,32.34 ccw(c38.51,31.798) 38.51,32.565 ccw(c38.51,33.332) J1.50@39.052,32.79 ; J1.50@39.141,32.43 ccw(c38.816,32.105) 38.816,32.565 ccw(c38.816,33.025) J1.50@39.141,32.7
C11_RMII2-RXD1: J1.48 U1.C11 | length 25.5
  Top Layer w0.127: U1.C11@23.775,24.294 v3(24.1,24.619) ; U1.C11@23.775,24.38 ccw(c23.775,24.589) 23.923,24.441 ccw(c24.07,24.294) U1.C11@23.862,24.294 ; v3@23.986,24.619 cw(c23.71,24.619) 23.905,24.423 cw(c24.1,24.228) v3@24.1,24.504
  L3 w0.127: v3@24.019,24.699 ccw(c23.824,24.895) 24.1,24.895 ccw(c24.376,24.895) v3@24.181,24.699 ; v3(24.1,24.619) 24.1,25.992 28.562,30.455 29.735,30.455 cw(c29.735,30.179) 30.01,30.179 30.01,30.108 ccw(c30.286,30.108) 30.286,29.833 30.522,29.833 ccw(c30.522,30.108) 30.797,30.108 30.797,30.179 cw(c31.073,30.179) 31.073,30.455 31.309,30.455 cw(c31.309,30.179) 31.585,30.179 31.585,30.108 ccw(c31.86,30.108) 31.86,29.833 32.097,29.833 ccw(c32.097,30.108) 32.372,30.108 32.372,30.179 cw(c32.648,30.179) 32.648,30.455 32.884,30.455 cw(c32.884,30.179) 33.16,30.179 33.16,30.108 ccw(c33.435,30.108) 33.435,29.833 33.672,29.833 ccw(c33.672,30.108) 33.947,30.108 33.947,30.179 cw(c34.223,30.179) 34.223,30.455 34.459,30.455 cw(c34.459,30.179) 34.734,30.179 34.734,30.108 ccw(c35.01,30.108) 35.01,29.833 35.246,29.833 ccw(c35.246,30.108) 35.522,30.108 35.522,30.179 cw(c35.797,30.179) 35.797,30.455 36.726,30.455 37.567,31.295 J1.48@39.365,31.295 ; J1.48@39.052,31.07 ccw(c38.51,30.528) 38.51,31.295 ccw(c38.51,32.062) J1.48@39.052,31.52 ; J1.48@39.141,31.16 ccw(c38.816,30.835) 38.816,31.295 ccw(c38.816,31.755) J1.48@39.141,31.43